# Allegro board democ2.brd
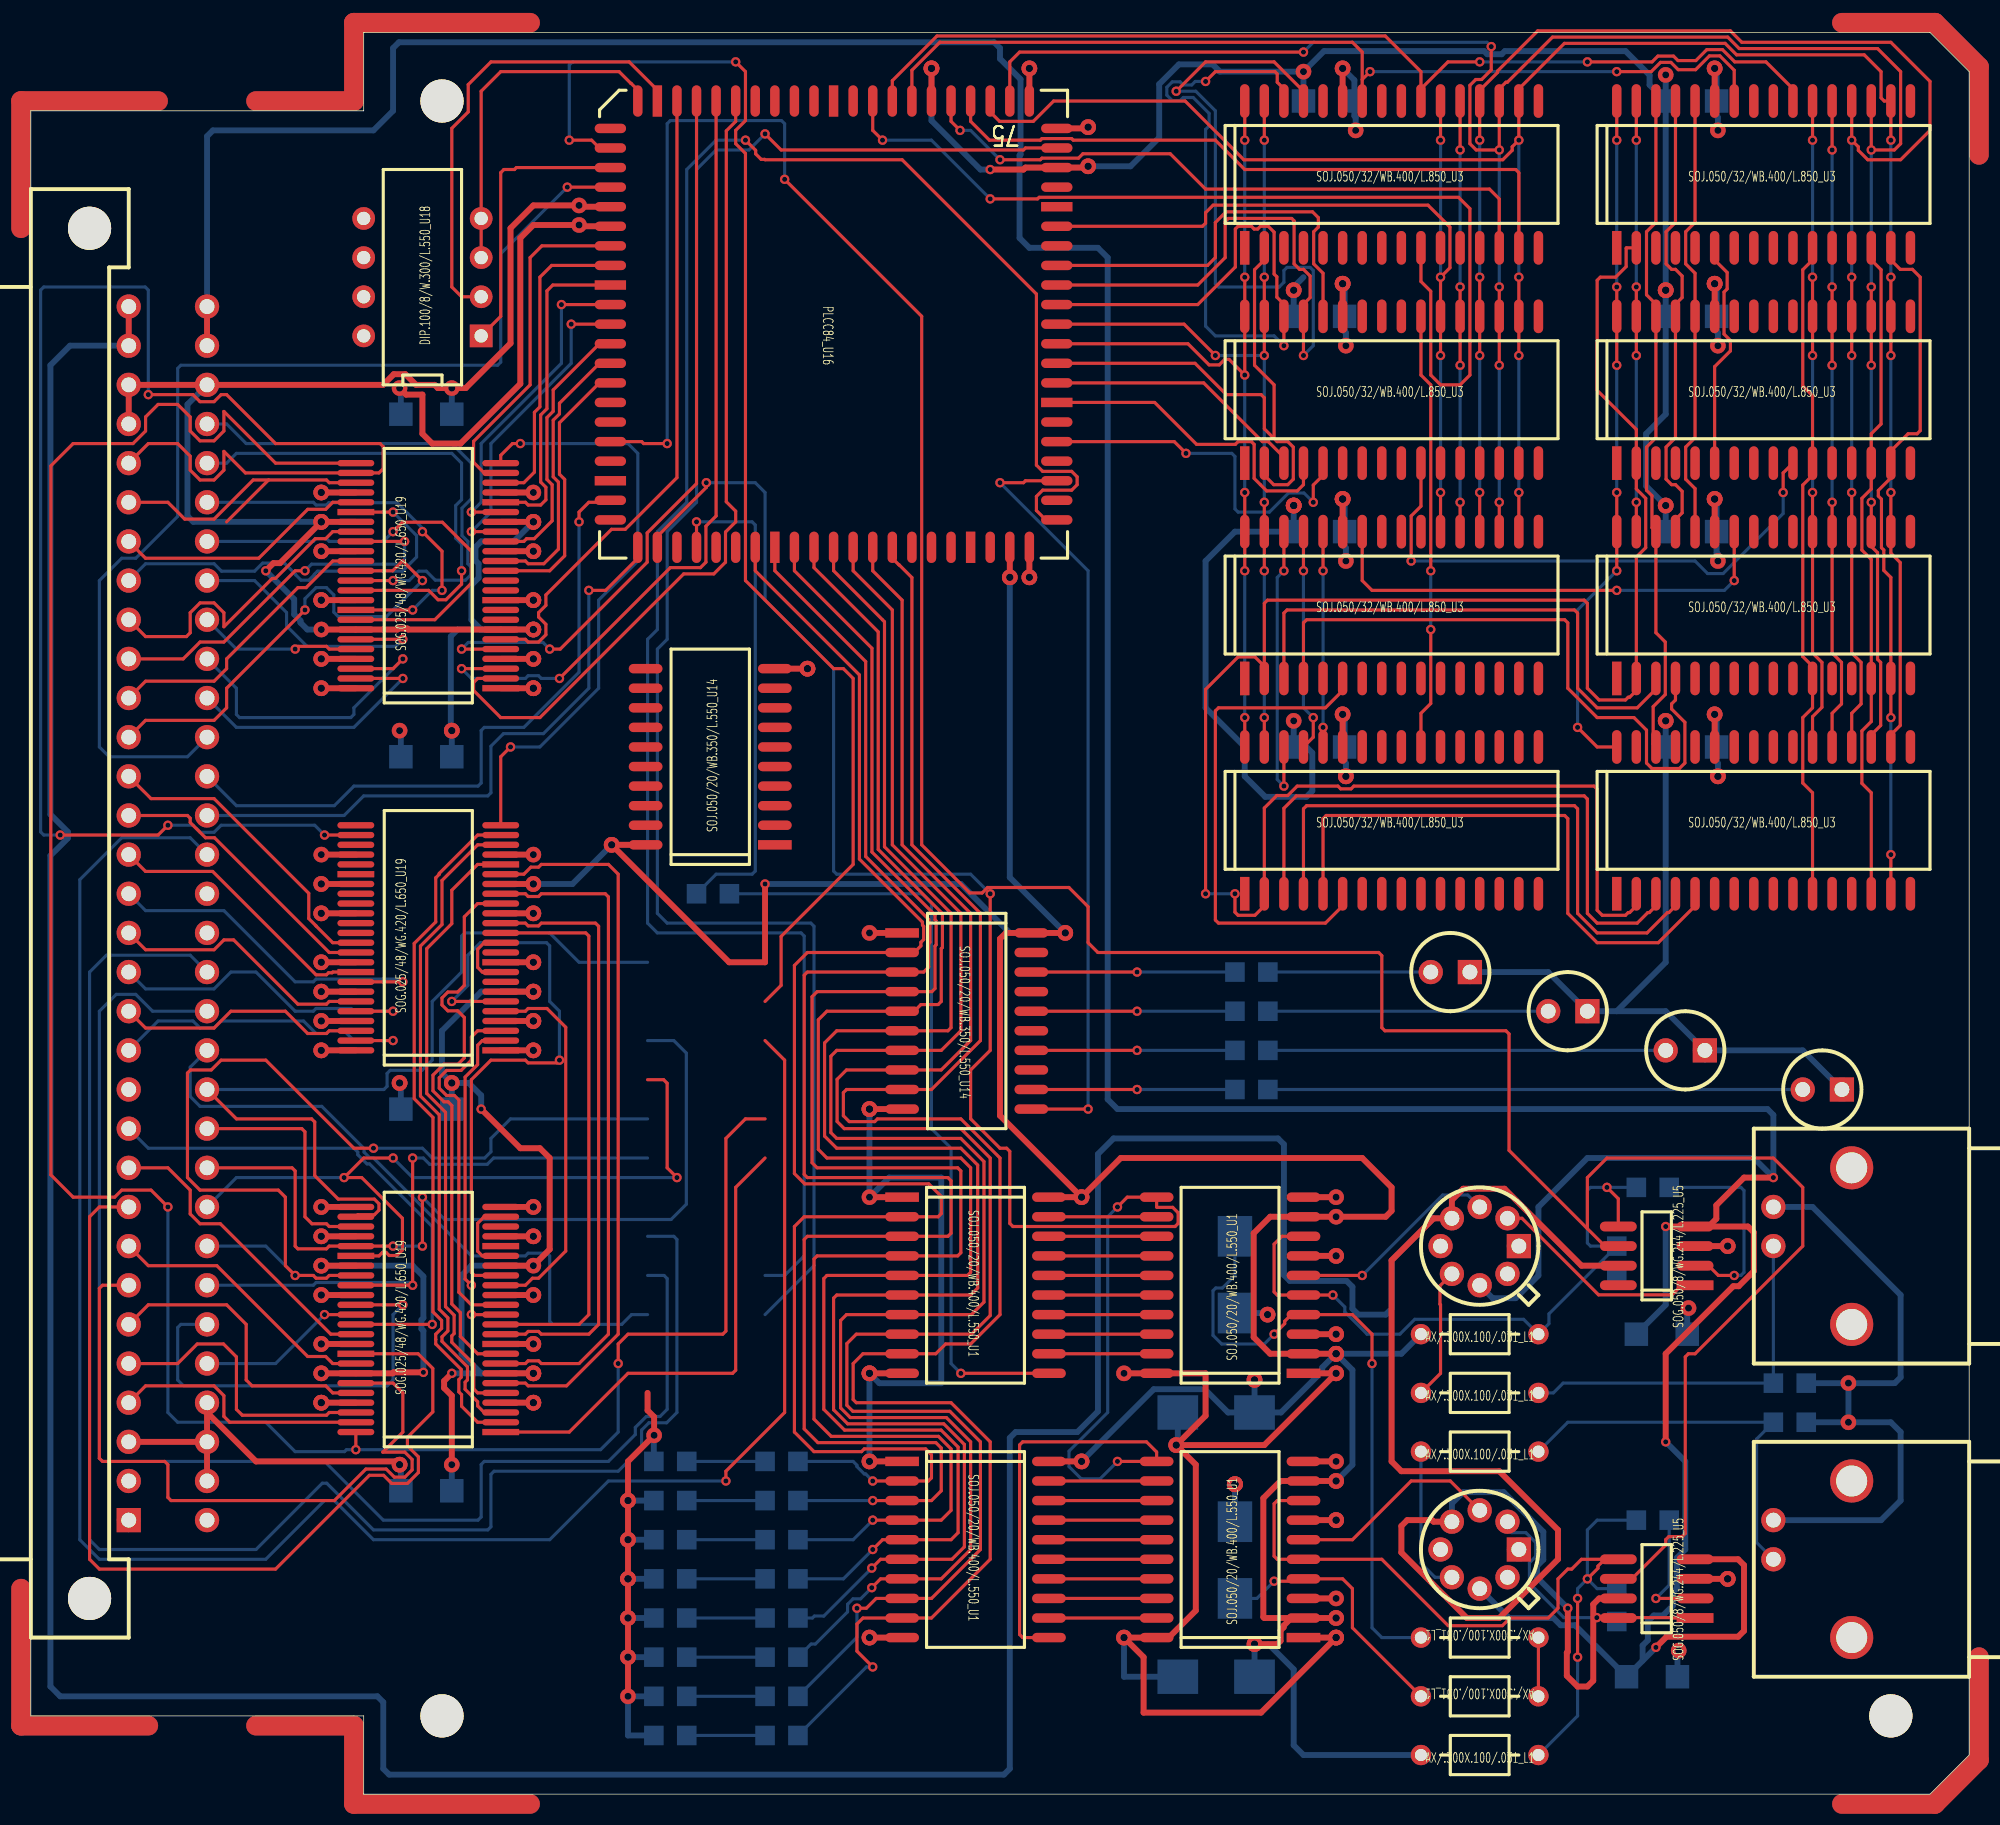
[diagram p0: board, top side]
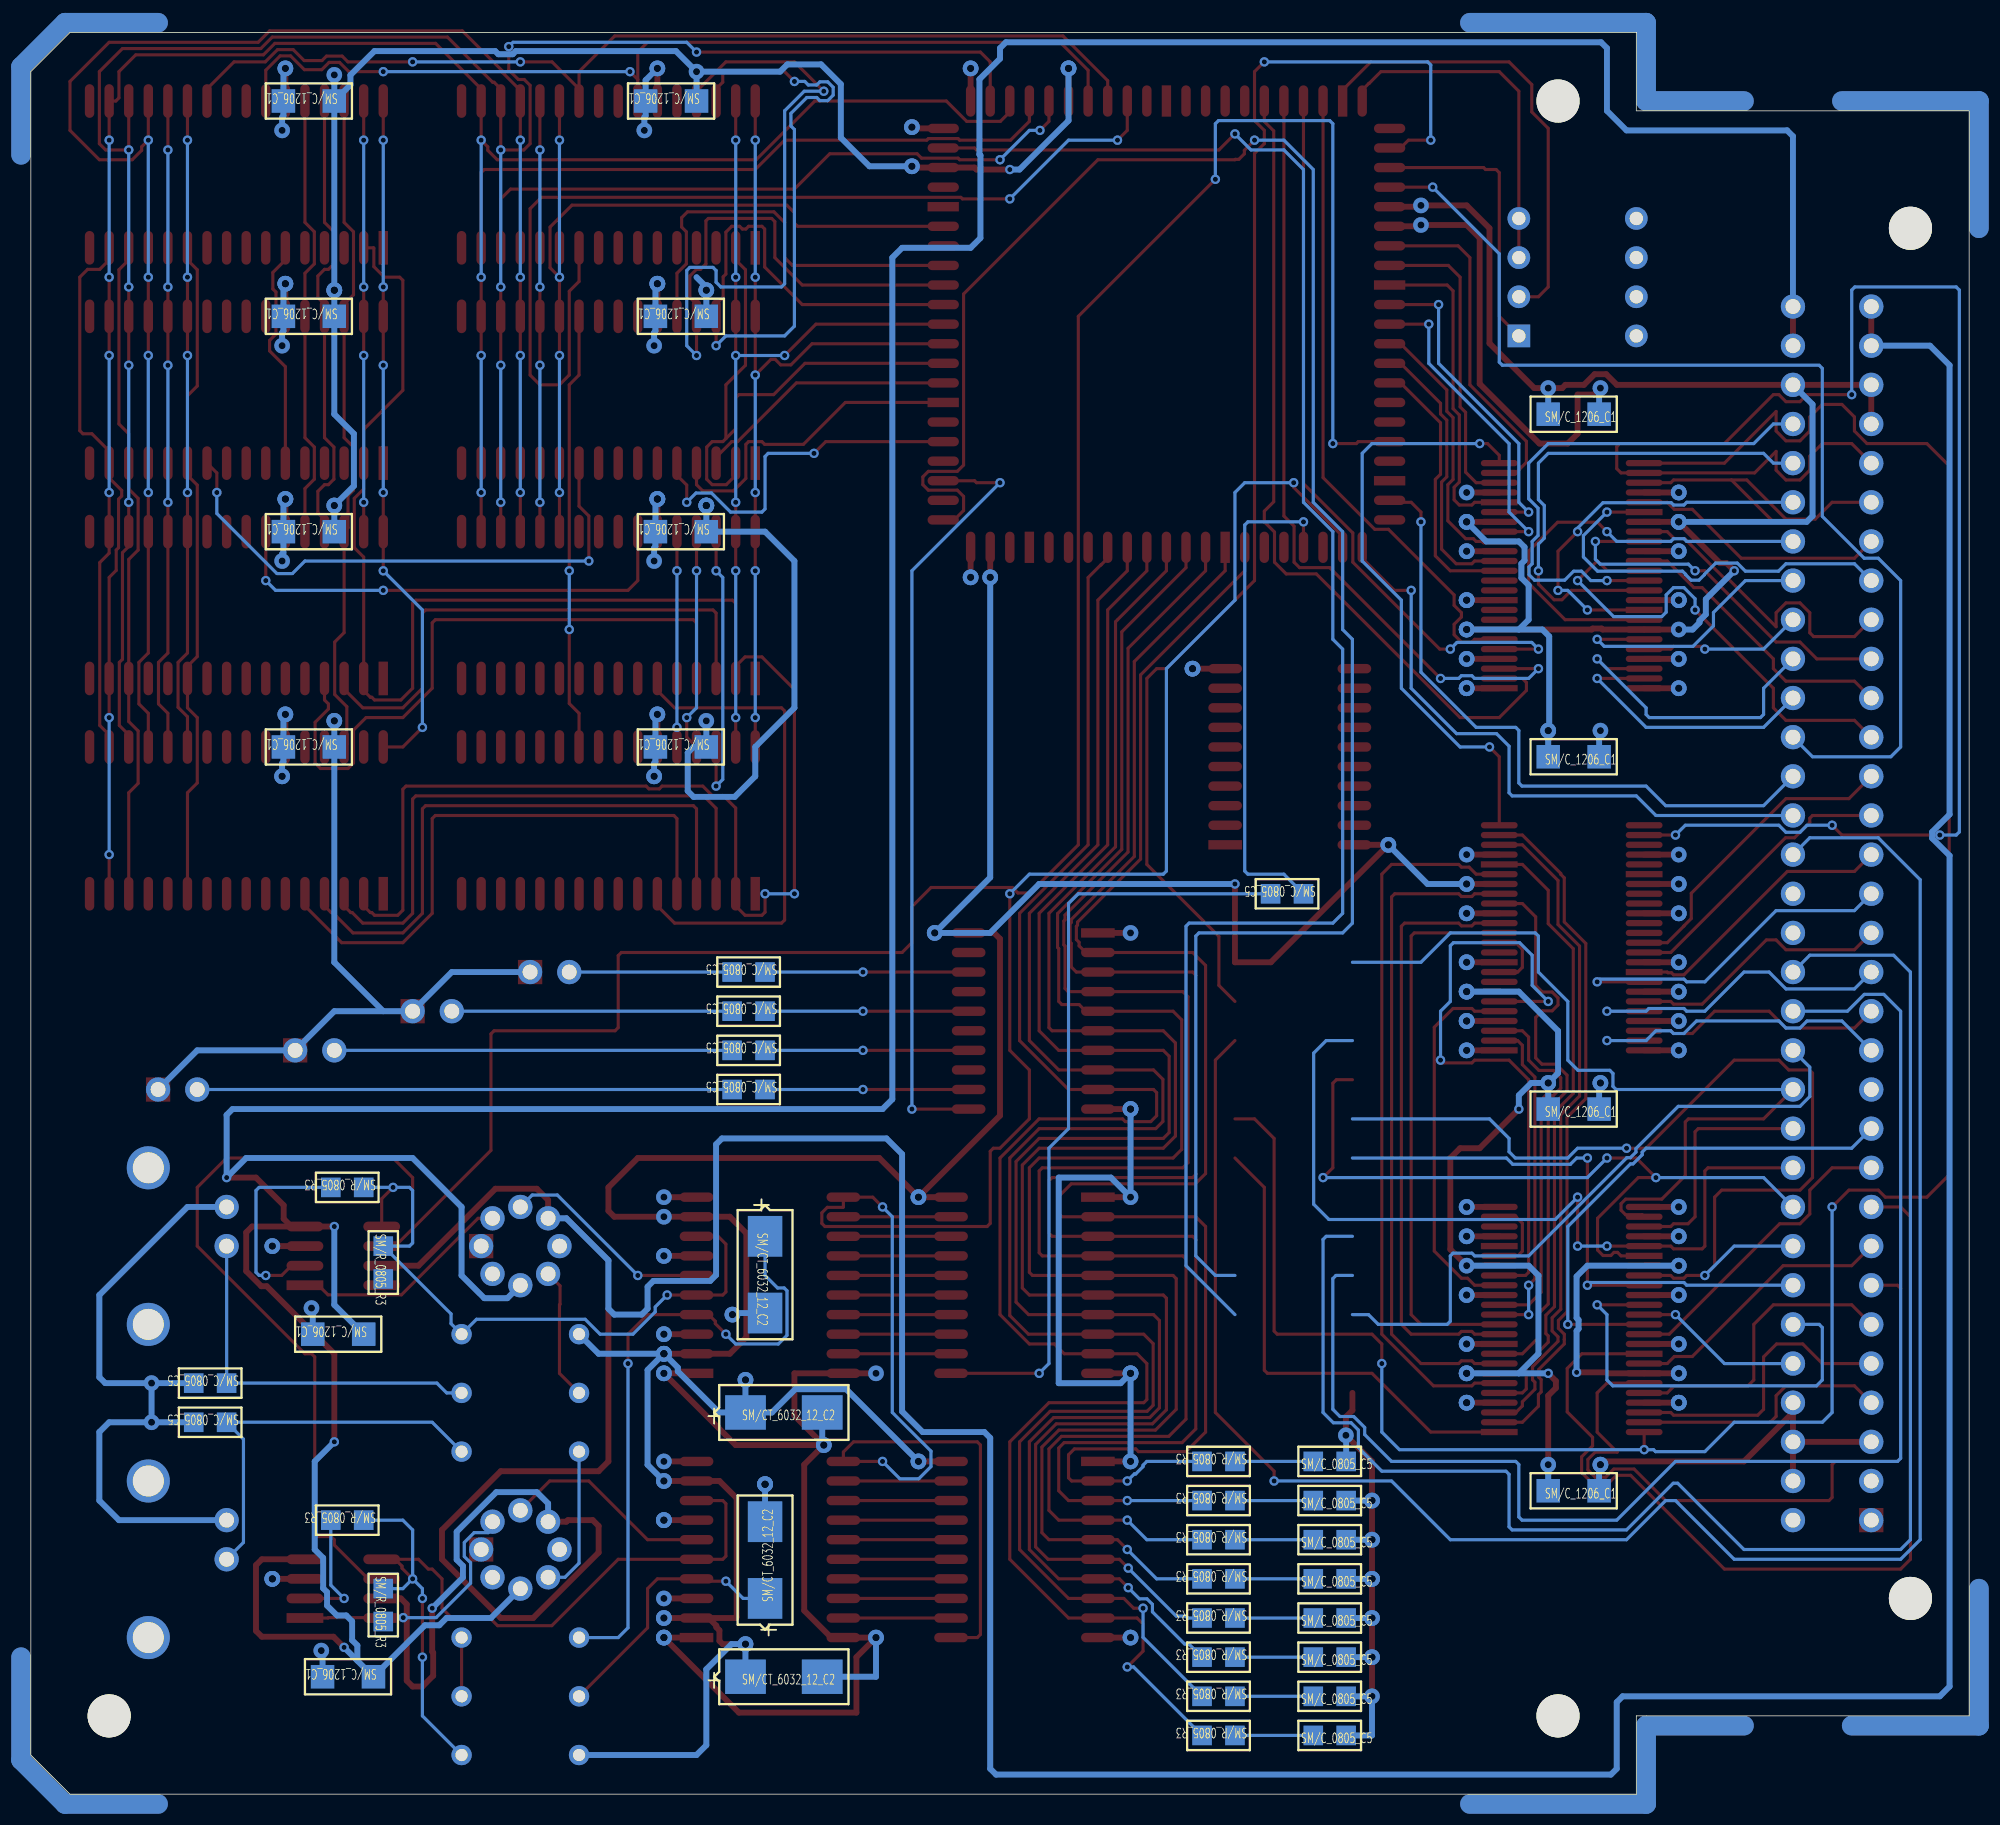
[diagram p1: board, bottom side, seen from below]

Outline 125.73 x 114.3 mm; copper layers: TOP, GND, POWER, BOTTOM. Coordinates in mm from the lower left corner of the outline.
Outline path: 0,109.22 21.59,109.22 21.59,114.3 123.19,114.3 125.73,111.76 125.73,2.54 123.19,0 21.59,0 21.59,5.08 0,5.08 0,109.22

## Design rules (mm)
nets with their own width: min track width 0.203; nets A0 A1 A2 A3 A4 A5 A6 A7 A8 A9 A10 A11 A12 A13 A14 A15 A16 A17 A18 A19 A20 A21 A22 A23 AEN/ BA0 BA1 BA2 BA3 BD0 BD1 BD2 BD3 BD4 BD5 BD6 BD7 BD8 BD9 BD10 BD11 BD12 BD13 BD14 BD15 BRD/ BRESET BWR/ D0 D1 D2 D3 D4 D5 D6 D7 D9 D10 D11 D12 D13 D14 D15 DDIR DEN/ DHEN/ FPGA/ GAIN HS/ MCLK MRD/ MWR/ N00036 N00036_6360 N00038 N00038_6372 N00044 N00044_6366 N00046 N00046_6362 N00048 N00048_6359 N00060 N00060_6368 N00306 N00318 N00322 N00671 N00689 N00703 N00717 N00827 N00831 N00835 N00837 N04966 N05690 N05692 N05694 N05696 N05698 N05700 N05702 N05704 N11940 N11950 N11984 N11994 N12004 N19706 N19710 N19714 N19718 N19934 N19938 N19942 N23417 N23878 N24816 N24821 N24826 N84247 N103899 N255822 N314771 N315146 N315333 N320476 N336036 N336041 OUTA OUTC RA0 RA1 RA2 RA3 RA4 RA5 RA6 RA7 RA8 RA9 RA10 RA11 RA12 RA13 RA14 RA15 RD0 RD1 RD2 RD3 RD4 RD5 RD6 RD7 RDY/ RESET/ SEL VCLKA VCLKC VD0 VD1 VD2 VD3 VD4 VD5 VD6 VD7 WAIT/ WSTAT/
nets with their own width: min track width 0.381; nets AGND GND GND_EARTH V12N V+12 VCC

## Placement (name value [footprint] x y rotation side)
C1  .1UF  [SMC1206]  104.14 29.84 0 bottom
C2  .1UF  [SMCT603212]  79.38 24.77 180 bottom
C3  .1UF  [SMCT603212]  79.38 7.62 180 bottom
C4  .1UF  [SMC1206]  106.05 109.86 0 bottom
C5  3300  [SMC0805]  42.55 6.35 180 bottom
C6  .1UF  [SMC1206]  103.51 7.62 0 bottom
C7  3300  [SMC0805]  42.55 21.59 180 bottom
C8  3300  [SMC0805]  42.55 8.89 180 bottom
C9  .1UF  [SMC1206]  27.3 89.53 180 bottom
C10  .1UF  [SMC1206]  27.3 67.31 180 bottom
C11  .1UF  [SMC1206]  27.3 44.45 180 bottom
C12  .1UF  [SMC1206]  106.05 81.91 0 bottom
C13  .1UF  [SMC1206]  106.05 95.89 0 bottom
C14  .1UF  [SMC1206]  106.05 67.95 0 bottom
C15  .1UF  [SMC1206]  27.3 19.69 180 bottom
C16  3300  [SMC0805]  42.55 11.43 180 bottom
C17  3300  [SMC0805]  42.55 13.97 180 bottom
C18  47PF  [SMC0805]  113.03 26.67 0 bottom
C19  3300  [SMC0805]  42.55 3.81 180 bottom
C20  3300  [SMC0805]  42.55 16.51 180 bottom
C21  .1UF  [SMCT603212]  78.11 12.7 90 bottom
C22  .1UF  [SMCT603212]  78.11 36.2 270 bottom
C23  47PF  [SMC0805]  113.03 24.13 0 bottom
C24  3300  [SMC0805]  42.55 19.05 180 bottom
C25  .1UF  [SMC1206]  82.55 109.86 0 bottom
C26  .1UF  [SMC1206]  81.92 95.89 0 bottom
C27  .1UF  [SMC1206]  81.92 81.91 0 bottom
C28  .1UF  [SMC1206]  81.92 67.95 0 bottom
D1  DIODE PHOTO EMIT  [LED]  100.97 50.8 180 top
D2  DIODE PHOTO EMIT  [LED]  93.34 53.34 180 top
D3  DIODE PHOTO EMIT  [LED]  108.59 48.26 180 top
D4  DIODE PHOTO EMIT  [LED]  117.48 45.72 180 top
J1  CON PAD  [DIN64P]  6.35 17.78 90 top
J2  CHANNEL 1  [BNC2P]  113.03 15.24 270 top
J3  CHANNEL 2  [BNC2P]  113.03 35.56 270 top
L1  50  [AX300X100031]  90.17 22.23 0 top
L2  50  [AX300X100031]  90.17 29.84 0 top
L3  50  [AX300X100031]  97.79 6.35 180 top
L4  50  [AX300X100031]  90.17 26.03 0 top
L5  50  [AX300X100031]  97.79 10.16 180 top
L6  50  [AX300X100031]  90.17 2.54 0 top
MTH1  -  [MTHOLE1]  26.67 109.86 0 top
MTH2  -  [MTHOLE1]  26.67 5.08 0 top
MTH3  -  [MTHOLE1]  120.65 5.08 0 top
R1  150  [SMC0805]  78.11 53.34 0 bottom
R2  150  [SMC0805]  78.11 50.8 0 bottom
R3  100  [SMR0805]  104.14 17.78 0 bottom
R4  100  [SMR0805]  102.87 13.34 270 bottom
R5  100  [SMR0805]  102.87 35.56 270 bottom
R6  100  [SMR0805]  104.14 39.37 0 bottom
R7  50  [SMR0805]  47.62 21.59 0 bottom
R8  50  [SMR0805]  47.62 8.89 0 bottom
R9  50  [SMR0805]  47.62 11.43 0 bottom
R10  50  [SMR0805]  47.62 6.35 0 bottom
R11  50  [SMC0805]  43.18 58.42 0 bottom
R12  150  [SMC0805]  78.11 45.72 0 bottom
R13  50  [SMR0805]  47.62 19.05 0 bottom
R14  50  [SMR0805]  47.62 16.51 0 bottom
R15  50  [SMR0805]  47.62 13.97 0 bottom
R16  50  [SMR0805]  47.62 3.81 0 bottom
R17  150  [SMC0805]  78.11 48.26 0 bottom
U1  TLC5602A  [SOJ05020WB400L550]  82.55 10.16 90 top
U2  TLC5602A  [SOJ05020WB400L550]  82.55 27.3 90 top
U3  TC55B4257J  [SOJ05032WB400L850]  102.87 86.36 0 top
U4  TC55B4257J  [SOJ05032WB400L850]  102.87 100.33 0 top
U5  DG419A  [SOG0508WG244L225]  107.95 33.02 90 top
U6  DG419A  [SOG0508WG244L225]  107.95 11.43 90 top
U8  TC55B4257J  [SOJ05032WB400L850]  78.74 72.39 0 top
U9  TC55B4257J  [SOJ05032WB400L850]  78.74 100.33 0 top
U10  TC55B4257J  [SOJ05032WB400L850]  102.87 72.39 0 top
U11  TC55B4257J  [SOJ05032WB400L850]  102.87 58.42 0 top
U12  TC55B4257J  [SOJ05032WB400L850]  78.74 58.42 0 top
U13  TC55B4257J  [SOJ05032WB400L850]  78.74 86.36 0 top
U14  ACT574  [SOJ05020WB350L550]  56.52 55.88 270 top
U15  ACT574  [SOJ05020WB400L550]  56.52 21.59 270 top
U16  EPF8282  [PLCC84]  52.07 109.86 270 top
U17  ACT574  [SOJ05020WB400L550]  56.52 38.73 270 top
U18  EPC1064  [DIP1008W300L550]  29.21 94.61 90 top
U19  FCT16245  [SOG02548WG420L650]  30.48 71.75 90 top
U20  FCT16245  [SOG02548WG420L650]  30.48 23.49 90 top
U21  FCT16245  [SOG02548WG420L650]  30.48 48.26 90 top
U22  TLE2037A  [TO-99]  96.52 35.56 90 top
U23  TLE2037A  [TO-99]  96.52 15.88 90 top
U25  74ACT574  [SOJ05020WB350L550]  48.26 61.59 90 top

## Library data of the parts
C1-C3 C5-C8 C16 C17 C19-C22 C24 = CAP: alternate symbols: (SMCT603212;SMC0805)
C4 C9-C15 C25-C28 = CAP_NP
C18 C23 = CAPACITOR
D1-D4 = DIODE_PHOTO_EMIT
J1 = 64CONSEPPINS
J2 J3 = BNC
L1-L6 = INDUCTOR
MTH1-MTH3 = MTHOLE1
R1-R17 = R: alternate symbols: (SMR0805)
U1 U2 = TLC5602A
U3 U4 U8-U13 = TC56B4257J
U5 U6 = DG419A
U14 U15 U17 = ACT574: alternate symbols: (SOJ05020WB400L550)
U16 = FPGA_0
U18 = EPC1064
U19-U21 = FCT16245
U22 U23 = TLE2037A
U25 = 74ACT574

## Footprints (pads in the part's own frame, mm; a bottom-side part is the same pattern mirrored in y, then rotated)
AX300X100031
  round 1.321 hole 0.787: 1(0,0) 2(7.62,0)
BNC2P
  round 1.575 hole 0.965: 1(0,0) 2(-2.54,0)
  round 2.794 hole 2.007: 3(5.08,5.08) 4(-5.08,5.08)
DIN64P
  rect 1.575x1.575 hole 0.965: 1(0,0)
  round 1.575 hole 0.965: 2(2.54,0) 3(5.08,0) 4(7.62,0) 5(10.16,0) 6(12.7,0) 7(15.24,0) 8(17.78,0) 9(20.32,0) 10(22.86,0) 11(25.4,0) 12(27.94,0) 13(30.48,0) 14(33.02,0) 15(35.56,0) 16(38.1,0) 17(40.64,0) 18(43.18,0) 19(45.72,0) 20(48.26,0) 21(50.8,0) 22(53.34,0) 23(55.88,0) 24(58.42,0) 25(60.96,0) 26(63.5,0) 27(66.04,0) 28(68.58,0) 29(71.12,0) 30(73.66,0) 31(76.2,0) 32(78.74,0) 33(0,-5.08) 34(2.54,-5.08) 35(5.08,-5.08) 36(7.62,-5.08) 37(10.16,-5.08) 38(12.7,-5.08) 39(15.24,-5.08) 40(17.78,-5.08) 41(20.32,-5.08) 42(22.86,-5.08) 43(25.4,-5.08) 44(27.94,-5.08) 45(30.48,-5.08) 46(33.02,-5.08) 47(35.56,-5.08) 48(38.1,-5.08) 49(40.64,-5.08) 50(43.18,-5.08) 51(45.72,-5.08) 52(48.26,-5.08) 53(50.8,-5.08) 54(53.34,-5.08) 55(55.88,-5.08) 56(58.42,-5.08) 57(60.96,-5.08) 58(63.5,-5.08) 59(66.04,-5.08) 60(68.58,-5.08) 61(71.12,-5.08) 62(73.66,-5.08) 63(76.2,-5.08) 64(78.74,-5.08)
  round 2.794 hole 2.794: 65(83.82,2.54) 66(-5.08,2.54)
DIP1008W300L550
  rect 1.473x1.473 hole 0.864: 1(0,0)
  round 1.473 hole 0.864: 2(2.54,0) 3(5.08,0) 4(7.62,0) 5(7.62,7.62) 6(5.08,7.62) 7(2.54,7.62) 8(0,7.62)
LED
  rect 1.575x1.575 hole 0.965: 1(0,0)
  round 1.575 hole 0.965: 2(2.54,0)
MTHOLE1
  round 2.794 hole 2.794: 1(0,0)
PLCC84
  rect 2.032x0.61 smd: 1(0,0) 10(0,-11.43) 40(28.956,-3.81) 50(28.956,8.89)
  oval 2.032x0.61 smd: 2(0,-1.27) 3(0,-2.54) 4(0,-3.81) 5(0,-5.08) 6(0,-6.35) 7(0,-7.62) 8(0,-8.89) 9(0,-10.16) 11(0,-12.7) 33(28.956,-12.7) 34(28.956,-11.43) 35(28.956,-10.16) 36(28.956,-8.89) 37(28.956,-7.62) 38(28.956,-6.35) 39(28.956,-5.08) 41(28.956,-2.54) 42(28.956,-1.27) 43(28.956,0) 44(28.956,1.27) 45(28.956,2.54) 46(28.956,3.81) 47(28.956,5.08) 48(28.956,6.35) 49(28.956,7.62) 51(28.956,10.16) 52(28.956,11.43) 53(28.956,12.7) 75(0,12.7) 76(0,11.43) 77(0,10.16) 78(0,8.89) 79(0,7.62) 80(0,6.35) 81(0,5.08) 82(0,3.81) 83(0,2.54) 84(0,1.27)
  oval 0.61x2.032 smd: 12(1.778,-14.478) 13(3.048,-14.478) 14(4.318,-14.478) 15(5.588,-14.478) 16(6.858,-14.478) 17(8.128,-14.478) 18(9.398,-14.478) 19(10.668,-14.478) 21(13.208,-14.478) 22(14.478,-14.478) 23(15.748,-14.478) 24(17.018,-14.478) 25(18.288,-14.478) 26(19.558,-14.478) 27(20.828,-14.478) 28(22.098,-14.478) 29(23.368,-14.478) 31(25.908,-14.478) 32(27.178,-14.478) 54(27.178,14.478) 55(25.908,14.478) 56(24.638,14.478) 57(23.368,14.478) 58(22.098,14.478) 59(20.828,14.478) 61(18.288,14.478) 62(17.018,14.478) 63(15.748,14.478) 64(14.478,14.478) 65(13.208,14.478) 66(11.938,14.478) 67(10.668,14.478) 68(9.398,14.478) 69(8.128,14.478) 71(5.588,14.478) 72(4.318,14.478) 73(3.048,14.478) 74(1.778,14.478)
  rect 0.61x2.032 smd: 20(11.938,-14.478) 30(24.638,-14.478) 60(19.558,14.478) 70(6.858,14.478)
SMC0805
  rect 1.27x1.27 smd: 1(0,0) 2(2.134,0)
SMC1206
  rect 1.524x1.524 smd: 1(0,0) 2(3.302,0)
SMCT603212
  rect 2.642x2.235 smd: 1(0,0) 2(4.978,0)
SMR0805
  rect 1.27x1.27 smd: 1(0,0) 2(2.134,0)
SOG0508WG244L225
  rect 0.635x2.388 smd: 1(0,0)
  oval 0.635x2.388 smd: 2(1.27,0) 3(2.54,0) 4(3.81,0) 5(3.81,4.978) 6(2.54,4.978) 7(1.27,4.978) 8(0,4.978)
SOG02548WG420L650
  rect 0.406x2.388 smd: 1(0,0) 10(5.715,0) 20(12.065,0) 30(11.43,9.398) 40(5.08,9.398)
  oval 0.406x2.388 smd: 2(0.635,0) 3(1.27,0) 4(1.905,0) 5(2.54,0) 6(3.175,0) 7(3.81,0) 8(4.445,0) 9(5.08,0) 11(6.35,0) 12(6.985,0) 13(7.62,0) 14(8.255,0) 15(8.89,0) 16(9.525,0) 17(10.16,0) 18(10.795,0) 19(11.43,0) 21(12.7,0) 22(13.335,0) 23(13.97,0) 24(14.605,0) 25(14.605,9.398) 26(13.97,9.398) 27(13.335,9.398) 28(12.7,9.398) 29(12.065,9.398) 31(10.795,9.398) 32(10.16,9.398) 33(9.525,9.398) 34(8.89,9.398) 35(8.255,9.398) 36(7.62,9.398) 37(6.985,9.398) 38(6.35,9.398) 39(5.715,9.398) 41(4.445,9.398) 42(3.81,9.398) 43(3.175,9.398) 44(2.54,9.398) 45(1.905,9.398) 46(1.27,9.398) 47(0.635,9.398) 48(0,9.398)
SOJ05020WB350L550
  rect 0.61x2.184 smd: 1(0,0)
  oval 0.61x2.184 smd: 2(1.27,0) 3(2.54,0) 4(3.81,0) 5(5.08,0) 6(6.35,0) 7(7.62,0) 8(8.89,0) 9(10.16,0) 10(11.43,0) 11(11.43,8.382) 12(10.16,8.382) 13(8.89,8.382) 14(7.62,8.382) 15(6.35,8.382) 16(5.08,8.382) 17(3.81,8.382) 18(2.54,8.382) 19(1.27,8.382) 20(0,8.382)
SOJ05020WB400L550
  rect 0.61x2.184 smd: 1(0,0)
  oval 0.61x2.184 smd: 2(1.27,0) 3(2.54,0) 4(3.81,0) 5(5.08,0) 6(6.35,0) 7(7.62,0) 8(8.89,0) 9(10.16,0) 10(11.43,0) 11(11.43,9.525) 12(10.16,9.525) 13(8.89,9.525) 14(7.62,9.525) 15(6.35,9.525) 16(5.08,9.525) 17(3.81,9.525) 18(2.54,9.525) 19(1.27,9.525) 20(0,9.525)
SOJ05032WB400L850
  rect 0.61x2.184 smd: 1(0,0)
  oval 0.61x2.184 smd: 2(1.27,0) 3(2.54,0) 4(3.81,0) 5(5.08,0) 6(6.35,0) 7(7.62,0) 8(8.89,0) 9(10.16,0) 10(11.43,0) 11(12.7,0) 12(13.97,0) 13(15.24,0) 14(16.51,0) 15(17.78,0) 16(19.05,0) 17(19.05,9.525) 18(17.78,9.525) 19(16.51,9.525) 20(15.24,9.525) 21(13.97,9.525) 22(12.7,9.525) 23(11.43,9.525) 24(10.16,9.525) 25(8.89,9.525) 26(7.62,9.525) 27(6.35,9.525) 28(5.08,9.525) 29(3.81,9.525) 30(2.54,9.525) 31(1.27,9.525) 32(0,9.525)
TO-99
  rect 1.575x1.575 hole 0.965: 1(0,0)
  round 1.575 hole 0.965: 2(1.803,0.737) 3(2.54,2.54) 4(1.803,4.343) 5(0,5.08) 6(-1.803,4.343) 7(-2.54,2.54) 8(-1.803,0.737)

## Nets
AGND: C1.2(TP-2) C6.2(TP-2) C21.2(TP-2) C22.2(TP-2) J1.1(TP-1) J1.2(TP-2) J1.33(TP-33) U1.3(TP-3) U1.7(TP-7) U1.10(TP-10) U2.3(TP-3) U2.7(TP-7) U2.10(TP-10) U5.3(TP-3) U6.3(TP-3)
GND: C2.2(TP-2) C3.2(TP-2) C4.2(TP-2) C5.2(TP-2) C7.2(TP-2) C8.2(TP-2) C9.2(TP-2) C10.2(TP-2) C11.2(TP-2) C12.2(TP-2) C13.2(TP-2) C14.2(TP-2) C15.2(TP-2) C16.2(TP-2) C17.2(TP-2) C19.2(TP-2) C20.2(TP-2) C24.2(TP-2) C25.2(TP-2) C26.2(TP-2) C27.2(TP-2) C28.2(TP-2) J1.3(TP-3) J1.34(TP-34) J1.35(TP-35) J1.36(TP-36) U1.1(TP-1) U1.20(TP-20) U2.1(TP-1) U2.20(TP-20) U3.27(TP-27) U4.27(TP-27) U8.27(TP-27) U9.27(TP-27) U10.27(TP-27) U11.27(TP-27) U12.27(TP-27) U13.27(TP-27) U14.1(TP-1) U14.10(TP-10) U15.1(TP-1) U15.10(TP-10) U16.17(TP-17) U16.53(TP-53) U16.74(TP-74) U16.75(TP-75) U17.1(TP-1) U17.10(TP-10) U19.1(TP-1) U19.4(TP-4) U19.10(TP-10) U19.15(TP-15) U19.21(TP-21) U19.28(TP-28) U19.34(TP-34) U19.39(TP-39) U19.45(TP-45) U19.48(TP-48) U20.4(TP-4) U20.10(TP-10) U20.15(TP-15) U20.21(TP-21) U20.24(TP-24) U20.25(TP-25) U20.28(TP-28) U20.34(TP-34) U20.39(TP-39) U20.45(TP-45) U21.1(TP-1) U21.4(TP-4) U21.10(TP-10) U21.15(TP-15) U21.21(TP-21) U21.28(TP-28) U21.34(TP-34) U21.39(TP-39) U21.45(TP-45) U21.48(TP-48) U25.10(TP-10)
GND_EARTH: C18.2(TP-2) C23.2(TP-2) J2.2(TP-2) J3.2(TP-2)
V12N: J1.31(TP-31) J1.32(TP-32) U5.7(TP-7) U6.7(TP-7) U22.4(TP-4) U23.4(TP-4)
VCC: C2.1(TP-1) C3.1(TP-1) C4.1(TP-1) C9.1(TP-1) C10.1(TP-1) C11.1(TP-1) C12.1(TP-1) C13.1(TP-1) C14.1(TP-1) C15.1(TP-1) C25.1(TP-1) C26.1(TP-1) C27.1(TP-1) C28.1(TP-1) D1.1(TP-1) D2.1(TP-1) D3.1(TP-1) D4.1(TP-1) J1.29(TP-29) J1.30(TP-30) J1.62(TP-62) L2.1(TP-1) L6.1(TP-1) U1.2(TP-2) U1.9(TP-9) U2.2(TP-2) U2.9(TP-9) U14.20(TP-20) U15.20(TP-20) U16.16(TP-16) U16.52(TP-52) U16.72(TP-72) U16.80(TP-80) U17.20(TP-20) U19.7(TP-7) U19.18(TP-18) U19.31(TP-31) U19.42(TP-42) U20.7(TP-7) U20.18(TP-18) U20.31(TP-31) U20.42(TP-42) U21.7(TP-7) U21.18(TP-18) U21.31(TP-31) U21.42(TP-42) U25.20(TP-20)
A0: J1.54(TP-54) U19.47(TP-47)
A1: J1.55(TP-55) U19.46(TP-46)
A2: J1.56(TP-56) U19.44(TP-44)
A3: J1.57(TP-57) U19.43(TP-43)
A4: J1.58(TP-58) U19.41(TP-41)
A5: J1.59(TP-59) U19.40(TP-40)
A6: J1.60(TP-60) U19.38(TP-38)
A7: J1.61(TP-61) U19.37(TP-37)
A8: J1.13(TP-13) U21.47(TP-47)
A9: J1.14(TP-14) U21.46(TP-46)
A10: J1.15(TP-15) U21.44(TP-44)
A11: J1.16(TP-16) U21.43(TP-43)
A12: J1.17(TP-17) U21.41(TP-41)
A13: J1.18(TP-18) U21.40(TP-40)
A14: J1.19(TP-19) U21.38(TP-38)
A15: J1.20(TP-20) U21.37(TP-37)
A16: J1.37(TP-37) U20.36(TP-36)
A17: J1.38(TP-38) U20.35(TP-35)
A18: J1.39(TP-39) U20.33(TP-33)
A19: J1.40(TP-40) U20.32(TP-32)
A20: J1.41(TP-41) U20.30(TP-30)
A21: J1.42(TP-42) U20.29(TP-29)
A22: J1.43(TP-43) U20.27(TP-27)
A23: J1.44(TP-44) U20.26(TP-26)
AEN/: J1.47(TP-47)
BA0: U16.6(TP-6) U19.2(TP-2) U20.13(TP-13) U21.2(TP-2)
BA1: U16.7(TP-7) U19.3(TP-3) U20.14(TP-14) U21.3(TP-3)
BA2: U16.8(TP-8) U19.5(TP-5) U20.16(TP-16) U21.5(TP-5)
BA3: U16.9(TP-9) U19.6(TP-6) U20.17(TP-17) U21.6(TP-6)
BD0: U16.25(TP-25) U19.13(TP-13)
BD1: U16.24(TP-24) U19.14(TP-14)
BD2: U16.23(TP-23) U19.16(TP-16)
BD3: U16.22(TP-22) U19.17(TP-17)
BD4: U16.21(TP-21) U19.19(TP-19)
BD5: U16.20(TP-20) U19.20(TP-20)
BD6: U16.19(TP-19) U19.22(TP-22)
BD7: U16.18(TP-18) U19.23(TP-23)
BD8: U20.2(TP-2) U21.23(TP-23)
BD9: U20.3(TP-3) U21.22(TP-22)
BD10: U20.5(TP-5) U21.20(TP-20)
BD11: U20.6(TP-6) U21.19(TP-19)
BD12: U20.8(TP-8) U21.17(TP-17)
BD13: U20.9(TP-9) U21.16(TP-16)
BD14: U20.11(TP-11) U21.14(TP-14)
BD15: U20.12(TP-12) U21.13(TP-13)
BRD/: U16.73(TP-73)
BRESET: U16.12(TP-12)
BWR/: U16.54(TP-54)
D0: J1.28(TP-28) U19.26(TP-26) U21.26(TP-26)
D1: J1.27(TP-27) U19.27(TP-27) U21.27(TP-27)
D2: J1.26(TP-26) U19.29(TP-29) U21.29(TP-29)
D3: J1.25(TP-25) U19.30(TP-30) U21.30(TP-30)
D4: J1.24(TP-24) U19.32(TP-32) U21.32(TP-32)
D5: J1.23(TP-23) U19.33(TP-33) U21.33(TP-33)
D6: J1.4(TP-4) J1.22(TP-22) U19.35(TP-35) U20.47(TP-47) U21.35(TP-35)
D7: J1.21(TP-21) U19.36(TP-36) U21.36(TP-36)
D9: J1.5(TP-5) U20.46(TP-46)
D10: J1.6(TP-6) U20.44(TP-44)
D11: J1.7(TP-7) U20.43(TP-43)
D12: J1.8(TP-8) U20.41(TP-41)
D13: J1.9(TP-9) U20.40(TP-40)
D14: J1.10(TP-10) U20.38(TP-38)
D15: J1.11(TP-11) U20.37(TP-37)
DDIR: U19.24(TP-24) U20.1(TP-1) U21.24(TP-24)
DEN/: U19.25(TP-25) U20.48(TP-48)
DHEN/: U21.25(TP-25)
FPGA/: U16.30(TP-30)
GAIN: U5.6(TP-6) U6.6(TP-6) U16.28(TP-28)
HS/: U16.29(TP-29)
MCLK: J1.52(TP-52) U16.31(TP-31)
MRD/: J1.46(TP-46)
MWR/: J1.45(TP-45)
N00036_6360: L6.2(TP-2) R3.1(TP-1) R4.1(TP-1) U1.5(TP-5) U1.8(TP-8) U6.5(TP-5)
N00038_6372: C21.1(TP-1) L3.2(TP-2) U1.4(TP-4)
N00044_6366: U6.1(TP-1) U23.2(TP-2)
N00046_6362: R4.2(TP-2) U6.8(TP-8)
N00048_6359: R3.2(TP-2) U6.2(TP-2)
N00060_6368: U1.6(TP-6) U23.3(TP-3)
OUTA: L1.1(TP-1) U23.6(TP-6)
OUTC: L4.1(TP-1) U22.6(TP-6)
RA0: U3.5(TP-5) U4.5(TP-5) U8.5(TP-5) U9.5(TP-5) U10.5(TP-5) U11.5(TP-5) U12.5(TP-5) U13.5(TP-5) U16.58(TP-58)
RA1: U3.4(TP-4) U4.4(TP-4) U8.4(TP-4) U9.4(TP-4) U10.4(TP-4) U11.4(TP-4) U12.4(TP-4) U13.4(TP-4) U16.60(TP-60)
RA2: U3.3(TP-3) U4.3(TP-3) U8.3(TP-3) U9.3(TP-3) U10.3(TP-3) U11.3(TP-3) U12.3(TP-3) U13.3(TP-3) U16.61(TP-61)
RA3: U3.2(TP-2) U4.2(TP-2) U8.2(TP-2) U9.2(TP-2) U10.2(TP-2) U11.2(TP-2) U12.2(TP-2) U13.2(TP-2) U16.62(TP-62)
RA4: U3.32(TP-32) U4.32(TP-32) U8.32(TP-32) U9.32(TP-32) U10.32(TP-32) U11.32(TP-32) U12.32(TP-32) U13.32(TP-32) U16.63(TP-63)
RA5: U3.31(TP-31) U4.31(TP-31) U8.31(TP-31) U9.31(TP-31) U10.31(TP-31) U11.31(TP-31) U12.31(TP-31) U13.31(TP-31) U16.64(TP-64)
RA6: U3.30(TP-30) U4.30(TP-30) U8.30(TP-30) U9.30(TP-30) U10.30(TP-30) U11.30(TP-30) U12.30(TP-30) U13.30(TP-30) U16.65(TP-65)
RA7: U3.29(TP-29) U4.29(TP-29) U8.29(TP-29) U9.29(TP-29) U10.29(TP-29) U11.29(TP-29) U12.29(TP-29) U13.29(TP-29) U16.66(TP-66)
RA8: U3.28(TP-28) U4.28(TP-28) U8.28(TP-28) U9.28(TP-28) U10.28(TP-28) U11.28(TP-28) U12.28(TP-28) U13.28(TP-28) U16.67(TP-67)
RA9: U3.22(TP-22) U4.22(TP-22) U8.22(TP-22) U9.22(TP-22) U10.22(TP-22) U11.22(TP-22) U12.22(TP-22) U13.22(TP-22) U16.69(TP-69)
RA10: U3.21(TP-21) U4.21(TP-21) U8.21(TP-21) U9.21(TP-21) U10.21(TP-21) U11.21(TP-21) U12.21(TP-21) U13.21(TP-21) U16.70(TP-70)
RA11: U3.20(TP-20) U4.20(TP-20) U8.20(TP-20) U9.20(TP-20) U10.20(TP-20) U11.20(TP-20) U12.20(TP-20) U13.20(TP-20) U16.71(TP-71)
RA12: U3.19(TP-19) U4.19(TP-19) U8.19(TP-19) U9.19(TP-19) U10.19(TP-19) U11.19(TP-19) U12.19(TP-19) U13.19(TP-19) U16.76(TP-76)
RA13: U3.18(TP-18) U4.18(TP-18) U8.18(TP-18) U9.18(TP-18) U10.18(TP-18) U11.18(TP-18) U12.18(TP-18) U13.18(TP-18) U16.77(TP-77)
RA14: U3.15(TP-15) U4.15(TP-15) U8.15(TP-15) U9.15(TP-15) U10.15(TP-15) U11.15(TP-15) U12.15(TP-15) U13.15(TP-15) U16.78(TP-78)
RA15: U3.14(TP-14) U4.14(TP-14) U8.14(TP-14) U9.14(TP-14) U10.14(TP-14) U11.14(TP-14) U12.14(TP-14) U13.14(TP-14) U16.79(TP-79)
RD0: U4.26(TP-26) U8.26(TP-26) U9.26(TP-26) U10.26(TP-26) U16.81(TP-81)
RD1: U4.23(TP-23) U8.23(TP-23) U9.23(TP-23) U10.23(TP-23) U16.82(TP-82)
RD2: U4.10(TP-10) U8.10(TP-10) U9.10(TP-10) U10.10(TP-10) U16.83(TP-83)
RD3: U4.7(TP-7) U8.7(TP-7) U9.7(TP-7) U10.7(TP-7) U16.84(TP-84)
RD4: U3.26(TP-26) U11.26(TP-26) U12.26(TP-26) U13.26(TP-26) U16.1(TP-1)
RD5: U3.23(TP-23) U11.23(TP-23) U12.23(TP-23) U13.23(TP-23) U16.2(TP-2)
RD6: U3.10(TP-10) U11.10(TP-10) U12.10(TP-10) U13.10(TP-10) U16.3(TP-3)
RD7: U3.7(TP-7) U11.7(TP-7) U12.7(TP-7) U13.7(TP-7) U16.4(TP-4)
RDY/: J1.50(TP-50)
RESET/: J1.53(TP-53) U16.15(TP-15)
SEL: U16.13(TP-13)
V+12: C1.1(TP-1) C6.1(TP-1) J1.63(TP-63) J1.64(TP-64) U5.4(TP-4) U6.4(TP-4) U22.7(TP-7) U23.7(TP-7)
VCLKA: U1.11(TP-11) U2.11(TP-11) U15.11(TP-11) U16.34(TP-34)
VCLKC: R11.2(TP-2) U17.11(TP-11)
VD0: R7.2(TP-2) U14.2(TP-2) U15.2(TP-2) U16.39(TP-39) U17.2(TP-2)
VD1: R13.2(TP-2) U14.3(TP-3) U15.3(TP-3) U16.40(TP-40) U17.3(TP-3)
VD2: R14.2(TP-2) U14.4(TP-4) U15.4(TP-4) U16.41(TP-41) U17.4(TP-4)
VD3: R15.2(TP-2) U14.5(TP-5) U15.5(TP-5) U16.42(TP-42) U17.5(TP-5)
VD4: R9.2(TP-2) U14.6(TP-6) U15.6(TP-6) U16.43(TP-43) U17.6(TP-6)
VD5: R8.2(TP-2) U14.7(TP-7) U15.7(TP-7) U16.44(TP-44) U17.7(TP-7)
VD6: R10.2(TP-2) U14.8(TP-8) U15.8(TP-8) U16.45(TP-45) U17.8(TP-8)
VD7: R16.2(TP-2) U14.9(TP-9) U15.9(TP-9) U16.46(TP-46) U17.9(TP-9)
WAIT/: J1.51(TP-51) U16.33(TP-33)
WSTAT/: U14.11(TP-11) U16.56(TP-56)
N00036: L2.2(TP-2) R5.1(TP-1) R6.1(TP-1) U2.5(TP-5) U2.8(TP-8) U5.5(TP-5)
N00038: C22.1(TP-1) L5.2(TP-2) U2.4(TP-4)
N00044: U5.1(TP-1) U22.2(TP-2)
N00046: R5.2(TP-2) U5.8(TP-8)
N00048: R6.2(TP-2) U5.2(TP-2)
N00060: U2.6(TP-6) U22.3(TP-3)
N00306: U1.12(TP-12) U15.19(TP-19)
N00318: U1.15(TP-15) U15.16(TP-16)
N00322: U1.16(TP-16) U15.15(TP-15)
N00671: C19.1(TP-1) R16.1(TP-1)
N00689: C5.1(TP-1) R10.1(TP-1)
N00703: C8.1(TP-1) R8.1(TP-1)
N00717: C16.1(TP-1) R9.1(TP-1)
N00827: C17.1(TP-1) R15.1(TP-1)
N00831: C20.1(TP-1) R14.1(TP-1)
N00835: C24.1(TP-1) R13.1(TP-1)
N00837: C7.1(TP-1) R7.1(TP-1)
N04966: L3.1(TP-1) L5.1(TP-1)
N05690: U2.12(TP-12) U17.19(TP-19)
N05692: U2.18(TP-18) U17.13(TP-13)
N05694: U2.13(TP-13) U17.18(TP-18)
N05696: U2.19(TP-19) U17.12(TP-12)
N05698: U2.17(TP-17) U17.14(TP-14)
N05700: U2.14(TP-14) U17.17(TP-17)
N05702: U2.15(TP-15) U17.16(TP-16)
N05704: U2.16(TP-16) U17.15(TP-15)
N11940: U1.13(TP-13) U15.18(TP-18)
N11950: U1.14(TP-14) U15.17(TP-17)
N11984: U1.17(TP-17) U15.14(TP-14)
N11994: U1.18(TP-18) U15.13(TP-13)
N12004: U1.19(TP-19) U15.12(TP-12)
N19706: R1.1(TP-1) U14.18(TP-18)
N19710: R2.1(TP-1) U14.16(TP-16)
N19714: R17.1(TP-1) U14.14(TP-14)
N19718: R12.1(TP-1) U14.12(TP-12)
N19934: D4.2(TP-2) R12.2(TP-2)
N19938: D3.2(TP-2) R17.2(TP-2)
N19942: D1.2(TP-2) R2.2(TP-2)
N23417: U10.6(TP-6) U13.6(TP-6) U16.48(TP-48)
N23878: R11.1(TP-1) U16.36(TP-36)
N24816: U16.14(TP-14) U18.1(TP-1)
N24821: U16.10(TP-10) U18.2(TP-2)
N24826: U16.11(TP-11) U18.3(TP-3) U18.4(TP-4)
N84247: U19.9(TP-9) U20.22(TP-22) U21.9(TP-9) U21.12(TP-12)
N103899: U19.8(TP-8) U19.12(TP-12) U20.19(TP-19) U20.23(TP-23) U21.8(TP-8) U21.11(TP-11)
N255822: D2.2(TP-2) R1.2(TP-2)
N314771: U3.6(TP-6) U4.6(TP-6) U16.51(TP-51)
N315146: U9.6(TP-6) U11.6(TP-6) U16.50(TP-50)
N315333: U8.6(TP-6) U12.6(TP-6) U16.49(TP-49)
N320476: U3.11(TP-11) U4.11(TP-11) U8.11(TP-11) U9.11(TP-11) U10.11(TP-11) U11.11(TP-11) U12.11(TP-11) U13.11(TP-11) U16.57(TP-57)
N336036: C23.1(TP-1) J2.1(TP-1) L1.2(TP-2)
N336041: C18.1(TP-1) J3.1(TP-1) L4.2(TP-2)

Pads without a net: J1 12 48 49 65 66; J2 3 4; J3 3 4; MTH1 1; MTH2 1; MTH3 1; U3 1 8 9 12 13 16 17 24 25; U4 1 8 9 12 13 16 17 24 25; U8 1 8 9 12 13 16 17 24 25; U9 1 8 9 12 13 16 17 24 25; U10 1 8 9 12 13 16 17 24 25; U11 1 8 9 12 13 16 17 24 25; U12 1 8 9 12 13 16 17 24 25; U13 1 8 9 12 13 16 17 24 25; U14 13 15 17 19; U16 5 26 27 32 35 37 38 47 55 59 68; U18 5 6 7 8; U19 11; U20 20; U22 1 5 8; U23 1 5 8; U25 1 2 3 4 5 6 7 8 9 11 12 13 14 15 16 17 18 19

## Via types
v1: diameter 0.61, hole 0.33, TOP to BOTTOM, 200 vias
v2: diameter 1.016, hole 0.457, TOP to BOTTOM, 248 vias

## Routing (per net, layer and track width the routed paths; a pad name or vN(x,y) marks a point on that pad's centre or on a via; arc(x,y) is an arc through that point)
AGND: length 38.4
  TOP w0.381: U2.3 v2(84.67,29.84) ; v2(110.07,35.56) U5.3 ; U6.3 v2(110.07,13.97) ; v2(84.67,21.59) U1.10 ; 82.55,34.92 v2(84.67,34.92) ; v2(84.67,17.78) U1.7 ; U1.3 v2(84.67,12.7) ; v2(84.67,38.73) U2.10
  GND w0.381: J1.2 7.47,20.32 ; J1.2 5.23,20.32 ; J1.2 6.35,19.2 ; J1.2 6.35,21.44 ; 6.35,16.66 J1.1 ; J1.1 7.47,17.78 ; J1.1 5.23,17.78 ; J1.1 6.35,18.9 ; J1.33 11.43,18.9 ; J1.33 10.31,17.78 ; J1.33 11.43,16.66 ; J1.33 12.55,17.78
  BOTTOM w0.381: v2(80.22,31.12) 80.12,31.22 C22.2 ; C21.2 v2(78.11,20.11) ; v2(107.53,31.54) 107.44,31.45 C1.2 ; C6.2 106.81,9.23 v2(106.89,9.31)
GND: length 338.8
  TOP w0.381: U19.1 v2(32.6,71.75) ; U13.27 v2(85.09,98) ; U19.28 v2(18.84,84.45) ; 11.43,24.77 14.6,21.59 23.71,21.59 v2(23.92,21.38) ; 11.43,24.77 J1.35 ; 11.43,24.77 J1.36 ; U20.21 v2(32.6,36.2) ; v2(68.58,108.16) 68.5,108.08 U16.74 ; U1.1 v2(84.67,10.16) 79.8,5.29 72.18,5.29 72.18,8.89 v2(70.91,10.16) U1.20 73.81,10.16 75.56,11.91 75.56,21.38 v2(74.3,22.65) ; v2(18.84,73.66) U19.45 ; 21.08,53.98 v2(18.84,53.98) ; U19.34 v2(18.84,80.64) ; J1.35 J1.34 ; J1.35 J1.3 ; U20.10 v2(32.6,29.21) ; v2(85.09,84.03) U8.27 ; v2(54.4,10.16) U15.10 ; U20.25 v2(18.84,38.1) ; v2(64.77,78.95) U16.53 ; v2(32.6,57.15) U21.15 ; v2(70.91,27.3) U2.20 76.2,27.3 76.2,24.55 v2(74.3,22.65) ; U20.4 v2(32.6,25.4) ; U14.1 v2(54.4,55.88) ; U2.1 v2(84.67,27.3) 80.01,22.65 v2(74.3,22.65) ; U20.15 v2(32.6,32.38) ; U21.45 v2(18.84,50.16) ; U16.17 35.64,101.73 v2(35.56,101.81) 32.6,101.81 31.75,100.97 31.75,91.51 27.87,87.63 26.04,87.63 25.4,88.27 25.4,90.8 24.34,90.8 v2(23.92,91.23) ; U10.27 v2(109.22,84.03) ; U20.24 v2(32.6,38.1) ; U19.39 v2(18.84,77.47) ; v2(18.84,25.4) U20.45 ; v2(32.6,60.96) U21.21 ; U21.1 v2(32.6,48.26) ; v2(32.6,50.16) U21.4 ; v2(32.6,77.47) U19.10 ; v2(109.22,98) U3.27 ; v2(32.6,80.64) U19.15 ; U21.48 v2(18.84,48.26) ; U20.39 v2(18.84,29.21) ; U12.27 v2(85.09,70.06) ; U21.34 v2(18.84,57.15) ; v2(109.22,111.97) U4.27 ; U20.34 v2(18.84,32.38) ; U17.10 v2(54.4,27.3) ; U20.28 v2(18.84,36.2) ; v2(32.6,53.98) 30.48,53.98 ; 40,26.03 40,24.9 40.43,24.48 v2(40.43,23.28) 38.73,21.59 v2(38.73,19.05) v2(38.73,16.51) v2(38.73,13.97) v2(38.73,11.43) v2(38.73,8.89) v2(38.73,6.35) ; v2(85.09,111.97) U9.27 ; U16.75 v2(64.77,111.97) ; v2(18.84,71.75) U19.48 ; U14.10 v2(54.4,44.45) ; v2(50.38,73.02) U25.10 ; v2(109.22,70.06) U11.27 ; v2(32.6,73.66) U19.4 ; U21.28 v2(18.84,60.96) ; v2(54.4,21.59) U15.1 ; v2(32.6,84.45) U19.21 ; v2(54.4,38.73) U17.1
  BOTTOM w0.381: C8.2 v2(38.73,8.89) ; C11.2 24,46.06 v2(23.92,46.14) ; v2(23.92,21.38) 24,21.29 C15.2 ; v2(85.09,70.06) 85.22,69.93 85.22,66.98 85.3,66.89 v2(85.3,66.04) ; v2(85.94,107.95) 85.94,108.8 85.85,108.89 C25.2 85.85,111.21 v2(85.09,111.97) ; C10.2 24,68.92 v2(23.92,69) ; v2(85.09,84.03) 85.22,83.9 85.22,80.95 85.3,80.86 v2(85.3,80.01) ; v2(85.3,93.98) 85.3,94.83 85.22,94.92 85.22,97.87 v2(85.09,98) ; v2(109.43,66.04) 109.43,66.89 109.35,66.98 C14.2 109.35,69.93 v2(109.22,70.06) ; v2(70.91,10.16) 70.91,7.62 C3.2 ; v2(54.4,21.59) v2(54.4,27.3) 55.04,26.66 59.05,26.66 59.05,26.67 59.05,40 55.67,40 v2(54.4,38.73) v2(54.4,44.45) ; C9.2 24,91.14 v2(23.92,91.23) ; C2.2 74.4,22.75 v2(74.3,22.65) ; C20.2 v2(38.73,16.51) ; v2(40.43,23.28) 40.41,23.27 C7.2 ; C24.2 v2(38.73,19.05) ; v2(38.73,11.43) C16.2 ; v2(109.43,107.95) 109.43,108.8 109.35,108.89 C4.2 109.35,111.84 v2(109.22,111.97) ; v2(109.43,80.01) 109.43,80.46 109.35,80.54 C12.2 109.35,83.9 v2(109.22,84.03) ; v2(109.43,93.98) 109.43,94.83 109.35,94.92 C13.2 109.35,97.87 v2(109.22,98) ; v2(38.73,13.97) C17.2 ; C19.2 38.73,3.81 v2(38.73,6.35) C5.2
GND_EARTH: length 53.6
  GND w0.381: J3.2 114.18,38.1 ; J3.2 111.88,38.1 ; J3.2 113.03,36.95 ; J3.2 113.03,39.25 ; 113.03,16.63 J2.2 ; J2.2 113.03,18.93 ; J2.2 114.18,17.78 ; J2.2 111.88,17.78
  BOTTOM w0.381: v2(117.9,26.67) 120.9,26.67 121.28,27.05 121.28,32.38 115.57,38.1 J3.2 ; v2(117.9,26.67) v2(117.9,24.13) ; v2(117.9,26.67) C18.2 ; C23.2 v2(117.9,24.13) ; v2(117.9,24.13) 120.65,24.13 121.28,23.49 121.28,19.05 120.02,17.78 J2.2
V12N: length 338.4
  TOP w0.381: v1(99.7,12.07) 99.7,9.24 99.63,9.18 99.63,7.68 100.33,6.99 100.97,6.99 101.35,7.37 101.35,12.32 101.73,12.7 U6.7 ; U5.7 100.58,34.29 95.59,39.28 92.91,39.28 92.18,38.55 U22.4 90.99,37.36 88.27,34.64 88.27,21.59 88.9,20.95 95.25,20.95 99.06,17.14 99.06,15.24 95.25,11.43 93.15,11.43 88.9,15.68 88.9,17.4 89.28,17.78 90.89,17.78 90.99,17.68 U23.4 ; J1.32 J1.31
  BOTTOM w0.381: v1(99.7,12.07) 97.7,14.06 97.7,14.81 98.11,15.21 98.11,17.03 95.54,19.6 92.91,19.6 92.18,18.86 U23.4 ; U22.4 90.99,37.36 88.27,34.64 88.27,31.5 87.88,31.12 86.11,31.12 85.73,31.5 85.73,32.92 85.34,33.3 81.66,33.3 81.28,33.68 81.28,42.16 80.9,42.55 70.23,42.55 69.22,41.53 69.22,24.83 67.88,23.49 63.88,23.49 63.5,23.11 63.5,1.65 63.12,1.27 23.24,1.27 22.86,1.65 22.86,5.97 22.48,6.35 1.9,6.35 1.27,6.99 1.27,60.89 2.4,62.02 2.4,62.44 1.27,63.57 1.27,92.71 2.54,93.98 J1.31
VCC: length 608.4
  TOP w0.381: v2(84.67,28.58) U2.2 80.39,28.58 79.32,29.65 79.32,36.39 80.39,37.46 v2(84.67,37.46) 87.88,37.46 88.27,37.85 88.27,39.37 86.36,41.27 70.7,41.27 v2(68.16,38.73) ; U17.20 v2(68.16,38.73) ; v2(68.16,38.73) 62.86,44.03 62.86,55.5 63.25,55.88 U14.20 v2(67.1,55.88) ; U21.31 v2(18.84,59.05) ; v2(84.67,20.32) U1.9 81.06,20.32 79.95,19.2 79.95,11.49 80.01,11.43 81.76,11.43 ; v2(68.58,105.62) 68.5,105.54 64.52,105.54 64.39,105.41 v1(62.23,105.41) ; v2(84.67,11.43) U1.2 81.76,11.43 ; v2(18.84,75.56) U19.42 23.78,75.56 23.84,75.63 24.42,75.63 24.48,75.56 U19.7 v2(32.6,75.56) ; v1(25.46,27.37) 23.53,27.37 23.47,27.3 U20.42 v2(18.84,27.3) ; v1(27.3,27.3) 26.81,26.81 26.81,26.36 27.3,25.86 v2(27.3,21.38) ; v1(29.21,44.45) 31.75,41.91 33.02,41.91 33.66,41.27 33.66,35.35 v2(32.6,34.29) U20.18 ; U21.7 v2(32.6,52.07) ; U20.31 v2(18.84,34.29) ; U19.18 v2(32.6,82.55) ; 81.76,11.43 81.26,10.93 81.26,10.83 81.06,10.63 81.06,9.94 80.86,9.74 v2(79.38,9.74) ; v1(15.24,79.38) 15.74,79.87 16.16,79.87 v2(18.84,82.55) U19.31 ; U20.7 v2(32.6,27.3) ; v2(18.84,52.07) U21.42 ; v2(63.5,78.95) U16.52 ; U16.16 35.64,103 v2(35.56,103.08) 32.59,103.08 31.11,101.6 31.11,94.13 28.21,91.23 v2(27.3,91.23) 26.4,91.23 26.19,91.44 24.99,91.44 24.3,92.13 23.54,92.13 22.85,91.44 J1.62 J1.30 J1.29 ; v1(47.62,59.05) 47.62,53.98 45.3,53.98 v2(37.68,61.59) U25.20 ; U15.20 v2(68.16,21.59) ; U21.18 v2(32.6,59.05) ; v2(58.42,111.97) U16.80
  BOTTOM w0.381: 84.67,28.58 85.73,27.52 85.73,21.37 84.67,20.32 v2(84.67,20.32) ; 84.67,28.58 88.9,28.58 L2.1 ; 84.67,28.58 v2(84.67,28.58) 84.66,28.58 83.76,27.68 83.76,27.44 81.09,24.77 C2.1 ; v2(32.6,82.55) 31.33,81.28 29.21,81.28 28.84,80.91 28.84,80.04 29.04,79.83 29.04,78.92 28.57,78.45 28.57,76.2 29.21,75.56 ; v2(32.6,52.07) 29.21,52.07 26.66,49.52 26.66,46.78 v2(27.3,46.14) ; C2.1 v2(79.38,26.88) ; C2.1 77.66,24.77 76.15,26.28 72.84,26.28 v2(68.16,21.59) ; D4.1 114.94,48.26 D3.1 106.05,50.8 102.87,50.8 ; D2.1 98.42,53.34 D1.1 102.87,50.8 ; C4.1 v2(106.05,111.55) ; C4.1 v2(106.05,97.58) C13.1 106.05,89.53 104.78,88.27 104.78,84.88 v2(106.05,83.61) C12.1 ; C4.1 105,110.9 105,111.53 103.44,113.09 95.61,113.09 95.4,112.89 94.47,112.89 94.27,113.09 83.88,113.09 v2(82.55,111.76) ; v2(27.3,91.23) C9.1 ; 29.21,75.56 27.69,75.56 27.24,75.12 27.24,69.07 v2(27.3,69) C10.1 ; 29.21,75.56 v2(32.6,75.56) ; C3.1 v2(79.38,9.74) 80.28,9.74 81.92,8.1 81.92,3.17 82.55,2.54 L6.1 ; v2(27.3,46.14) 28.4,46.14 29.21,45.34 v1(29.21,44.45) ; v2(27.3,46.14) C11.1 ; v2(32.6,59.05) 35.14,59.05 v2(37.68,61.59) ; v2(32.6,34.29) 28.57,34.29 27.94,33.66 27.94,28.58 29.21,27.3 ; v1(62.23,105.41) 61.59,105.41 58.42,108.58 v2(58.42,111.97) ; v2(106.05,69.64) C14.1 106.05,53.98 102.87,50.8 ; v2(82.55,111.76) 77.13,111.76 76.66,112.23 74.47,112.23 73.19,110.95 73.19,107.48 71.33,105.62 v2(68.58,105.62) ; v2(82.55,111.76) C25.1 ; v2(63.5,78.95) 63.5,59.48 v2(67.1,55.88) 63.5,55.88 60.33,59.05 v1(47.62,59.05) ; J1.62 10.16,90.17 10.16,82.93 10.54,82.55 v2(18.84,82.55) ; 29.21,27.3 v1(27.3,27.3) ; 29.21,27.3 v2(32.6,27.3) ; v2(81.92,83.61) C27.1 78.11,81.91 76.2,80.01 76.2,70.48 78.74,67.95 78.74,66.04 80.07,64.71 82.74,64.71 83.12,65.09 83.12,67.56 82.74,67.95 C28.1 v2(81.92,69.64) ; 82.55,98.42 81.92,97.79 v2(81.92,97.58) C26.1 ; v1(25.46,27.37) 25.46,30.06 25.34,30.19 25.34,30.77 25.46,30.9 25.46,33.59 24.77,34.29 v2(18.84,34.29) ; v2(27.3,21.38) C15.1 ; v1(15.24,79.38) 17.08,77.53 17.08,76.55 17.49,76.14 17.49,76.01 17.93,75.56 v2(18.84,75.56)
A0: length 17.9
  TOP w0.203: v1(24.13,72.39) U19.47
  BOTTOM w0.203: J1.54 13.33,69.22 20.95,69.22 v1(24.13,72.39)
A1: length 20.4
  TOP w0.203: v1(24.13,73.66) 23.49,73.02 U19.46
  BOTTOM w0.203: J1.55 13.33,71.75 13.33,70.05 13.54,69.85 20.75,69.85 20.95,70.05 20.95,70.48 v1(24.13,73.66)
A2: length 10.6
  TOP w0.203: v1(17.14,74.3) 17.32,74.47 19.18,74.47 19.35,74.3 U19.44
  BOTTOM w0.203: J1.56 13.33,74.3 v1(17.14,74.3)
A3: length 18.2
  TOP w0.203: v1(24.13,74.93) U19.43
  BOTTOM w0.203: v1(24.13,74.93) 23.67,74.47 17.91,74.47 16.59,75.8 16.59,76.67 14.51,78.74 J1.57
A4: length 29.1
  TOP w0.203: v1(23.49,81.91) 24.1,82.52 26.7,82.52 28.57,80.64 28.57,78.57 26.21,76.2 U19.41
  BOTTOM w0.203: v1(23.49,81.91) 22.86,81.28 19.35,81.28 19.18,81.46 18.5,81.46 18.32,81.28 J1.58
A5: length 25.5
  TOP w0.203: v1(24.77,76.83) U19.40 ; v1(25.4,81.91) 26.67,80.64 v1(26.67,78.11)
  BOTTOM w0.203: J1.59 18.32,83.82 18.5,83.64 19.18,83.64 19.33,83.79 23.75,83.79 25.4,82.14 v1(25.4,81.91) ; v1(24.77,76.83) 26.04,78.11 v1(26.67,78.11)
A6: length 32.7
  TOP w0.203: U19.38 25.81,78.11 26.42,77.5 26.92,77.5 27.94,78.51 v1(27.94,79.38)
  BOTTOM w0.203: v1(27.94,79.38) 27.94,81.11 27.56,81.49 27.56,83.61 27.94,83.99 27.94,86.36 27.3,87 13.33,87 12.7,86.36 J1.60
A7: length 34
  TOP w0.203: v1(23.49,78.74) U19.37
  BOTTOM w0.203: J1.61 12.7,88.9 13.97,87.63 27.3,87.63 28.57,86.36 28.57,84.05 27.97,83.44 27.97,81.66 28.35,81.28 28.35,79.83 28.55,79.63 28.55,79.12 28.19,78.77 26.24,78.77 25.65,79.35 25.15,79.35 24.54,78.74 v1(23.49,78.74)
A8: length 21.4
  TOP w0.203: v1(23.49,48.89) U21.47
  BOTTOM w0.203: J1.13 8.25,50.16 10.52,50.16 10.98,49.71 11.88,49.71 12.34,50.16 17.69,50.16 18.5,49.35 19.18,49.35 19.35,49.53 20.32,49.53 20.95,48.89 v1(23.49,48.89)
A9: length 16.3
  TOP w0.203: J1.14 7.44,49.71 11.88,49.71 12.98,50.8 16.51,50.8 17.96,49.35 19.18,49.35 19.35,49.53 U21.46
A10: length 21.7
  TOP w0.203: v1(23.49,50.8) U21.44
  BOTTOM w0.203: J1.15 7.44,52.25 11.88,52.25 12.98,53.34 14.6,53.34 17.14,50.8 18.32,50.8 18.5,50.98 20.78,50.98 20.95,50.8 v1(23.49,50.8)
A11: length 17.2
  TOP w0.203: J1.16 7.44,54.79 11.88,54.79 12.52,55.43 13.15,55.43 17.32,51.26 19.18,51.26 19.35,51.43 U21.43
A12: length 23.3
  TOP w0.203: v1(24.13,52.7) U21.41
  BOTTOM w0.203: v1(24.13,52.7) 23.95,52.88 18.5,52.88 18.32,52.7 17.14,52.7 12.52,57.33 7.44,57.33 J1.17
A13: length 18
  TOP w0.203: J1.18 7.44,59.87 11.8,59.87 18.5,53.16 19.18,53.16 19.31,53.29 19.54,53.29 19.58,53.34 U21.40
A14: length 18.6
  TOP w0.203: J1.19 10.16,63.5 10.34,63.32 10.34,63.05 11.33,62.05 11.91,62.05 19.35,54.61 U21.38
A15: length 20.2
  TOP w0.203: J1.20 7.8,64.59 11.88,64.59 18.03,58.45 18.03,56.81 18.5,56.34 18.5,56.33 19.58,55.24 U21.37
A16: length 11
  TOP w0.203: v1(19.05,31.12) U20.36
  BOTTOM w0.203: v1(19.05,31.12) 15.88,27.94 J1.37
A17: length 27.9
  TOP w0.203: v1(24.13,31.75) U20.35
  BOTTOM w0.203: v1(24.13,31.75) 23.49,31.12 23.49,26.87 23.11,26.49 9.91,26.49 9.52,26.87 9.52,30.28 9.73,30.48 J1.38
A18: length 41
  TOP w0.203: U20.33 v1(24.77,33.02) v1(24.77,41.27)
  BOTTOM w0.203: 40,41.27 30.02,41.27 29.61,40.87 25.86,40.87 25.46,41.27 v1(24.77,41.27) ; J1.39 18.32,33.02 18.5,33.2 24.59,33.2 v1(24.77,33.02)
A19: length 64
  TOP w0.203: v1(22.23,41.91) 20.95,41.91 15.24,47.62 12.34,47.62 11.71,46.99 10.36,46.99 10.16,46.79 10.16,40 10.97,39.19 16.05,39.19 16.51,38.73 16.51,34.29 v1(17.14,33.66) 18.32,33.66 18.5,33.48 19.18,33.48 19.35,33.66 U20.32
  BOTTOM w0.203: 40,43.81 31.11,43.81 29.84,42.55 29.84,41.68 29.44,41.27 26.04,41.27 25.4,41.91 v1(22.23,41.91) ; v1(17.14,33.66) 15.24,35.56 J1.40
A20: length 50.4
  TOP w0.203: v1(23.49,41.27) 21.59,41.27 v1(20.32,40) 21.46,40 24.1,37.36 24.1,35.31 23.75,34.95 23.24,34.95 23.04,35.15 22.81,35.15 22.58,34.92 U20.30 ; 40,46.35 41.05,46.35 41.27,46.13 41.27,40.64 v1(41.91,40)
  BOTTOM w0.203: v1(20.32,40) 13.33,40 J1.41 ; v1(23.49,41.27) 24.77,40 v1(41.91,40)
A21: length 53
  TOP w0.203: v1(23.49,35.56) U20.29 19.35,35.56 19.18,35.38 17.32,35.38 17.14,35.56 17.14,40.44 16.94,40.64 J1.42 ; v1(25.4,38.73) v1(25.4,35.56)
  BOTTOM w0.203: v1(25.4,35.56) v1(23.49,35.56) ; 40,48.89 41.71,48.89 42.52,48.08 42.52,38.28 41.53,37.29 26.85,37.29 v1(25.4,38.73)
A22: length 15.5
  TOP w0.203: J1.43 17.58,43.18 17.78,42.98 17.78,37.46 18.24,37.01 19.18,37.01 19.35,36.83 U20.27
A23: length 56
  TOP w0.203: U20.26 21.21,37.59 22.28,37.59 22.58,37.89 22.58,38.31 22.28,38.61 19.94,38.61 18.41,40.13 18.41,43.61 18.21,43.81 13.33,43.81 J1.44
  BOTTOM w0.203: J1.44 22.9,45.72 23.11,45.92 23.11,46.76 23.31,46.96 25.37,46.96 26.04,47.62 26.04,51.43 27.94,53.34 27.94,55.68 28.14,55.88 33.66,55.88 35.56,53.98 40,53.98
AEN/: length 105.8
  BOTTOM w0.203: 40,36.2 41.71,36.2 41.91,35.99 41.91,24.77 41.24,24.1 40.09,24.1 39.62,23.62 39.62,22.5 39.47,22.35 39.47,22.33 38.1,20.95 30.05,20.95 29.84,20.75 29.84,17.35 29.64,17.14 22.23,17.14 19.19,20.18 18.91,20.18 14.6,15.88 4.44,15.88 3.81,16.51 3.81,53.34 4.9,54.43 10.34,54.43 J1.47
BA0: length 75.8
  TOP w0.203: v1(28.57,33.02) 28.17,33.43 28.17,46.53 28.98,47.34 28.98,48.59 29.29,48.89 U21.2 ; U19.2 28.98,72.39 28.72,72.13 28.72,71.61 30.48,69.85 33.02,69.85 42.34,79.17 44.3,79.17 45.06,79.93 45.06,81.89 45.72,82.55 45.72,83.24 45.11,83.85 45.11,107.92 45.72,108.53 U16.6 ; v1(28.57,31.12) U20.13
  BOTTOM w0.203: v1(28.57,33.02) v1(28.57,31.12)
BA1: length 76
  TOP w0.203: v1(27.94,73.02) U19.3 ; U16.7 44.45,82.93 43.79,82.27 43.79,79.93 43.43,79.58 41.48,79.58 v1(34.29,72.39) ; U20.14 28.57,31.75 27.76,32.56 27.76,45.04 27.48,45.33 26.97,45.33 26.49,45.81 26.49,46.48 26.97,46.96 27.91,46.96 28.57,47.62 28.57,49.12 28.98,49.53 U21.3
  BOTTOM w0.203: v1(27.94,73.02) 28.57,72.39 32.08,72.39 32.26,72.57 32.93,72.57 33.11,72.39 v1(34.29,72.39)
BA2: length 73
  TOP w0.203: v1(27.94,74.3) U19.5 ; U20.16 32.08,33.02 32.54,33.48 32.93,33.48 34.7,35.24 34.7,49.76 33.48,50.98 32.26,50.98 32.08,50.8 U21.5 ; v1(33.66,74.3) 34.34,74.3 39.98,79.93 39.98,81.83 43.18,85.03 U16.8
  BOTTOM w0.203: v1(33.66,74.3) 33.22,74.73 28.37,74.73 v1(27.94,74.3)
BA3: length 83.1
  TOP w0.203: v1(27.3,51.43) U21.6 ; U16.9 41.91,85.42 38.56,82.07 37.67,82.07 33.41,77.81 33.41,77.13 32.93,76.66 32.93,76.38 33.41,75.9 33.41,75.23 32.93,74.75 32.26,74.75 32.08,74.93 U19.6 ; v1(34.29,47.62) 34.11,47.45 32.26,47.45 32.08,47.62 29.84,47.62 28.57,46.35 28.57,33.86 28.78,33.66 U20.17
  BOTTOM w0.203: v1(34.29,47.62) 34.29,50.8 33.66,51.43 33.66,55.04 33.45,55.24 29.16,55.24 28.35,54.43 28.35,52.48 v1(27.3,51.43)
BD0: length 17.7
  TOP w0.203: U19.13 33.66,79.38 34.63,80.35 34.63,85.3 34.29,85.64 34.29,88.98 36.88,91.57 U16.25
BD1: length 18.4
  TOP w0.203: U16.24 36.88,92.84 34.29,90.25 34.29,89.55 33.88,89.15 33.88,85.47 34.22,85.13 34.22,80.78 33.27,79.83 32.26,79.83 32.08,80.01 U19.14
BD2: length 17.6
  TOP w0.203: U16.23 36.88,94.11 33.88,91.11 33.88,89.72 33.48,89.32 33.48,85.3 33.82,84.96 33.82,82.62 32.65,81.46 32.16,81.46 31.98,81.28 U19.16
BD3: length 20.6
  TOP w0.203: v1(28.57,81.91) U19.17 ; 37.59,95.38 v1(35.05,95.38)
  BOTTOM w0.203: v1(28.57,81.91) 29.84,83.19 29.84,87.63 35.05,92.84 v1(35.05,95.38)
BD4: length 21
  TOP w0.203: v1(28.57,83.19) U19.19 ; U16.21 v1(34.42,96.65)
  BOTTOM w0.203: v1(34.42,96.65) 34.42,92.84 29.21,87.63 29.21,83.82 v1(28.57,83.19)
BD5: length 21.3
  TOP w0.203: U16.20 33.86,97.92 33.48,97.54 33.48,89.89 33.07,89.49 33.07,85.13 33.41,84.79 33.41,83.98 33.07,83.64 32.26,83.64 32.08,83.82 U19.20
BD6: length 20.2
  TOP w0.203: U19.22 31.98,85.09 32.66,85.78 32.66,89.66 33.02,90.01 33.02,98.42 33.78,99.19 U16.19
BD7: length 22.4
  TOP w0.203: U19.23 29.41,85.72 28.72,86.41 28.72,87.77 32.38,91.44 32.38,99.69 33.15,100.46 37.59,100.46
BD8: length 44.9
  TOP w0.203: U20.2 28.98,24.13 27.94,25.17 27.94,25.92 27.76,26.1 27.76,26.9 27.91,27.05 27.91,27.56 26.26,29.21 26.26,29.5 26.26,29.51 26.26,29.84 26.64,30.23 26.64,30.73 26.09,31.29 26.09,43.91 24.87,45.13 24.87,55.2 26.26,56.59 26.26,59.45 26.49,59.68 26.49,59.74 28.98,62.23 U21.23
BD9: length 43.1
  TOP w0.203: U20.3 29.41,24.77 28.98,25.19 28.98,25.46 28.17,26.27 28.17,26.73 28.32,26.88 28.32,27.39 28.32,27.39 28.32,27.73 26.67,29.38 26.67,29.67 27.05,30.06 27.05,30.9 26.49,31.46 26.49,44.08 25.27,45.3 25.27,55.03 26.67,56.42 26.67,59.28 28.98,61.59 U21.22
BD10: length 40.2
  TOP w0.203: U20.5 28.98,26.03 28.73,26.29 28.73,27.22 28.73,27.22 28.73,27.9 27.3,29.32 27.3,29.73 27.46,29.89 27.46,31.07 26.9,31.63 26.9,44.25 25.68,45.47 25.68,54.86 27.3,56.48 27.3,58.65 28.98,60.32 U21.20
BD11: length 47.1
  TOP w0.203: U21.19 31.98,59.69 32.44,60.15 32.93,60.15 33.11,60.32 37.47,60.32 38.1,59.69 38.1,29.84 34.75,26.49 32.26,26.49 32.08,26.67 U20.6
BD12: length 43.5
  TOP w0.203: U21.17 32.08,58.42 32.26,58.24 32.93,58.24 33.11,58.42 37.26,58.42 37.47,58.22 37.47,29.84 35.56,27.94 33.11,27.94 32.93,28.12 32.26,28.12 32.08,27.94 U20.8
BD13: length 37.2
  TOP w0.203: 30.48,28.58 28.98,28.58 27.86,29.69 27.86,31.24 27.3,31.8 27.3,44.69 27.07,44.92 26.8,44.92 26.09,45.64 26.09,46.65 26.8,47.36 27.71,47.36 28.12,47.77 28.12,50.39 27.69,50.83 27.05,50.83 26.67,51.21 26.67,51.66 27.05,52.04 27.69,52.04 28.12,52.48 28.12,56.92 28.98,57.78 U21.16
BD14: length 39.2
  TOP w0.203: U20.11 32.08,29.84 32.26,30.02 32.93,30.02 33.11,29.84 36.2,29.84 36.83,30.48 36.83,56.31 36.63,56.52 33.11,56.52 32.93,56.34 32.26,56.34 32.08,56.52 U21.14
BD15: length 36.3
  TOP w0.203: U20.12 35.56,30.48 36.2,31.12 36.2,55.68 35.99,55.88 U21.13
BRD/: length 111.1
  TOP w0.203: v1(47.62,107.72) 48.67,106.68 64.39,106.68 64.52,106.81 U16.73
  BOTTOM w0.203: v1(47.62,107.72) 46.58,106.68 44.45,106.68 43.18,105.41 43.18,83.82 41.27,81.91 41.27,74.93 40.64,74.3 40.64,57.15 41.27,56.52 50.6,56.52 50.8,56.31 50.8,34.29 47.62,31.12
BWR/: length 132
  TOP w0.203: v1(46.36,107.31) 47.02,106.65 47.02,106.43 47.37,106.07 47.6,106.07 47.62,106.05 56.52,106.05 65.23,97.33 65.23,86.23 65.63,85.83 67.51,85.83 67.87,85.47 67.87,84.96 67.51,84.61 65.63,84.61 65.23,84.2 65.23,83.29 65.84,82.68 66.55,82.68
  BOTTOM w0.203: v1(46.36,107.31) 44.45,107.31 42.55,105.41 42.55,83.82 40.64,81.91 40.64,75.56 40,74.93 40,56.52 40.64,55.88 49.96,55.88 50.17,55.68 50.17,34.92 48.89,33.66 47.62,33.66
D0: length 109.7
  TOP w0.203: J1.28 7.62,87.63 9.52,87.63 10.34,86.81 10.34,85.91 10.98,85.27 11.88,85.27 12.52,85.91 12.52,87.12 13.92,85.72 U19.26 22.58,85.72 22.86,86 22.86,87.43 22.66,87.63 15.88,87.63 12.7,90.8 12.34,90.8 11.88,90.35 10.98,90.35 10.52,90.8 v1(7.62,90.8) ; v1(1.9,62.23) 8.25,62.23 v1(8.89,62.86) ; v1(19.05,62.23) U21.26
  BOTTOM w0.203: v1(19.05,62.23) 18.41,62.86 12.34,62.86 11.88,62.41 10.98,62.41 10.52,62.86 v1(8.89,62.86) ; v1(7.62,90.8) 7.62,97.59 7.42,97.79 0.84,97.79 0.63,97.59 0.63,62.43 0.84,62.23 v1(1.9,62.23)
D1: length 20.2
  TOP w0.203: 15.42,85.27 19.18,85.27 19.35,85.09 U19.27 ; 15.42,85.27 14.42,85.27 11.88,82.73 9.98,82.73 8.89,83.82 J1.27 ; 15.42,85.27 12.7,82.55
D2: length 16.7
  TOP w0.203: J1.26 7.44,80.19 14.78,80.19 17.96,83.36 19.13,83.36 19.58,83.82 U19.29
D3: length 26.6
  TOP w0.203: v1(23.49,83.19) U19.30
  BOTTOM w0.203: J1.25 7.44,79.83 11.88,79.83 12.37,79.35 14.51,79.35 15.04,79.87 16.44,79.87 17.17,79.15 17.17,79.12 17.53,78.77 18.03,78.77 18.39,79.12 18.39,79.15 18.59,79.35 24.1,79.35 25.02,80.27 25.02,81.66 v1(23.49,83.19)
D4: length 20.6
  TOP w0.203: J1.24 7.44,75.11 10.09,75.11 10.34,75.35 10.34,76.65 10.98,77.29 11.88,77.29 12.52,76.65 12.52,75.75 15.66,78.88 15.87,78.88 18.45,81.46 19.13,81.46 19.58,81.91 U19.32
D5: length 24.9
  TOP w0.203: v1(17.78,79.38) 17.14,79.38 12.52,74.75 10.98,74.75 9.88,73.66 J1.23 ; v1(24.24,81.28) U19.33
  BOTTOM w0.203: v1(24.24,81.28) 24.24,80.12 23.93,79.81 18.21,79.81 v1(17.78,79.38)
D6: length 35.7
  TOP w0.203: U19.35 19.58,80.01 17.86,78.28 17.32,78.28 12.7,73.66 12.7,73.02 11.89,72.21 7.44,72.21 J1.22 ; U20.47 12.9,24.13 12.52,24.51 12.52,25.85 11.88,26.49 7.44,26.49 J1.4
D7: length 31.7
  TOP w0.203: J1.21 7.44,69.67 11.89,69.67 12.7,70.48 12.7,71.75 v1(17.78,76.83) ; U19.36 23.47,79.38 24.1,80.01 24.13,80.01 v1(25.4,78.74)
  BOTTOM w0.203: v1(25.4,78.74) 23.06,76.4 19.94,76.4 19.65,76.69 19.65,77.81 19.18,78.28 18.5,78.28 17.78,77.56 v1(17.78,76.83)
D9: length 19.2
  TOP w0.203: J1.5 9.52,27.94 10.79,29.21 12.5,29.21 13.33,28.37 13.33,24.97 13.72,24.59 19.18,24.59 19.35,24.77 U20.46
D10: length 19.7
  TOP w0.203: U20.44 19.58,26.03 19.13,26.49 14.35,26.49 13.97,26.87 13.97,30.48 12.7,31.75 7.62,31.75 J1.6
D11: length 47.4
  TOP w0.203: J1.7 4.65,33.02 4.44,32.82 4.44,21.79 4.65,21.59 8.69,21.59 8.89,21.39 8.89,19.25 9.09,19.05 19.69,19.05 21.73,21.09 23.05,21.09 23.58,20.57 24.26,20.57 24.73,21.04 24.73,21.72 24.26,22.19 22.83,22.19 24.13,23.49 24.13,26.03 23.49,26.67 U20.43
D12: length 17.9
  TOP w0.203: J1.8 7.62,34.29 12.06,34.29 17.96,28.4 19.13,28.4 19.58,27.94 U20.41
D13: length 62.8
  TOP w0.203: 21.08,28.58 25.12,28.58 26.07,27.62 26.07,24.8 24.43,23.16 24.43,22.6 25.14,21.89 25.14,20.87 24.43,20.16 23.41,20.16 22.88,20.69 21.96,20.69 15.88,14.61 4.44,14.61 3.81,15.24 3.81,37.46 4.44,38.1 J1.9
D14: length 20.1
  TOP w0.203: J1.10 8.89,40.64 10.34,39.19 10.34,37.65 10.98,37.01 12.29,37.01 19.46,29.84 U20.38
D15: length 33.7
  TOP w0.203: v1(26.04,30.48) U20.37
  BOTTOM w0.203: v1(26.04,30.48) 26.04,36.83 21.97,40.89 21.8,40.89 21.21,41.49 21.21,41.66 20.95,41.91 7.62,41.91 J1.11
DDIR: length 70.4
  TOP w0.203: v1(31.11,67.95) 30.48,67.31 U21.24 ; v1(31.75,87.63) 31.24,87.63 30.48,86.87 U19.24 ; 47.62,41.27 45.72,39.37 45.72,27.51 45.52,27.3 38.73,27.3 34.92,23.49 U20.1
  BOTTOM w0.203: v1(31.75,87.63) 38.73,87.63 39.37,87 39.37,80.01 36.83,77.47 36.83,71.75 33.02,67.95 v1(31.11,67.95)
DEN/: length 155.1
  TOP w0.203: 47.62,43.81 46.36,43.81 45.08,42.55 45.08,30.05 44.88,29.84 38.73,29.84 38.1,29.21 v1(38.1,27.94) ; U20.48 v1(21.08,22.35) ; v1(8.89,38.1) 7.8,39.19 5.9,39.19 5.44,38.73 2.74,38.73 1.3,40.18 1.3,86.18 2.74,87.63 6.63,87.63 7.44,88.45 7.44,89.36 8.25,90.17 9.52,90.17 10.34,89.36 10.34,88.45 10.98,87.81 11.88,87.81 12.52,88.45 12.52,89.71 15.88,86.36 U19.25
  BOTTOM w0.203: v1(38.1,27.94) 38.1,23.49 36.96,22.35 v1(21.08,22.35) 20.47,22.35 20.35,22.23 17.14,22.23 15.24,24.13 9.52,24.13 8.89,24.77 v1(8.89,38.1)
GAIN: length 197.8
  TOP w0.203: U6.6 103.85,13.97 106.05,16.17 106.05,16.51 106.25,16.71 107.11,16.71 107.31,16.92 107.31,28.37 107.52,28.58 107.95,28.58 114.94,35.56 114.94,39.37 113.03,41.27 102.23,41.27 100.97,40 100.97,36.69 ; v1(41.27,87.63) 39.75,87.63 39.62,87.76 U16.28 ; 100.97,36.69 102.1,35.56 U5.6 ; 100.97,36.69 95.89,41.77 95.89,49.33 95.68,49.53 87.83,49.53 87.63,49.73 87.63,54.41 87.43,54.61 69.22,54.61 68.58,55.24 68.58,57.58 67.34,58.83 62.06,58.83 61.7,58.47 60.91,58.47 57.78,61.59 57.78,95.89 v1(48.89,104.77)
  BOTTOM w0.203: v1(48.89,104.77) 48.89,108.38 48.69,108.58 41.48,108.58 41.27,108.38 v1(41.27,87.63)
MCLK: length 43.2
  TOP w0.203: U16.31 37.47,83.82 36.2,83.82 35.56,83.19 v1(35.56,82.55)
  BOTTOM w0.203: J1.52 13.33,64.14 19.68,64.14 20.95,65.41 29.01,65.41 29.21,65.61 29.21,69.01 29.41,69.22 31.98,69.22 35.56,72.8 v1(35.56,82.55)
MRD/: length 90.5
  BOTTOM w0.203: J1.46 7.9,50.8 6.8,51.89 5.54,51.89 4.44,50.8 4.44,21.79 4.65,21.59 19.05,21.59 22.86,17.78 29.01,17.78 29.21,17.98 29.21,21.39 29.41,21.59 37.47,21.59 39.21,23.33 39.21,23.79 39.92,24.5 40.81,24.5 41.27,24.97 41.27,33.45 41.07,33.66 40,33.66
MWR/: length 42.3
  BOTTOM w0.203: 40,31.12 38.96,31.12 38.33,30.48 33.86,30.48 33.66,30.68 33.66,34.92 33.48,35.1 32.26,35.1 32.08,34.92 28.57,34.92 22.2,41.3 21.97,41.3 21.62,41.66 21.62,41.88 18.87,44.63 10.98,44.63 10.34,45.27 10.34,47.17 J1.45
N00036_6360: length 55.8
  TOP w0.203: v1(100.97,13.97) 101.65,14.66 101.65,14.8 102.1,15.24 ; 102.1,15.24 100.58,15.24 99.95,14.61 99.7,14.61 99.06,13.97 99.06,12.07 98.42,11.43 95.95,11.43 95.45,10.93 91.94,10.93 87.63,15.24 U1.5 80.85,15.24 80.64,15.44 80.64,18.85 80.85,19.05 U1.8 ; 102.1,15.24 U6.5 ; v1(100.33,8.89) v1(100.33,12.7)
  BOTTOM w0.203: v1(100.33,8.89) 100.33,5.08 L6.2 ; v1(100.97,13.97) 100.33,13.34 v1(100.33,12.7) ; v1(100.97,13.97) 100.97,17.14 101.6,17.78 R3.1 ; v1(100.97,13.97) 101.6,13.34 R4.1
N00038_6372: length 17.2
  TOP w0.203: L3.2 85.73,10.79 85.73,13.34 85.09,13.97 U1.4 82.4,13.82 v1(80.64,13.82)
  BOTTOM w0.203: v1(80.64,13.82) 79.53,12.7 C21.1
N00044_6366: length 17.1
  TOP w0.203: U6.1 106.45,11.43 106.43,11.46 v1(101.57,11.46)
  BOTTOM w0.203: v1(101.57,11.46) 99.44,11.46 97.21,13.69 97.21,15.01 97.61,15.42 97.61,16.33 96.97,16.97 96.06,16.97 95.78,17.25 U23.2
N00048_6359: length 8
  TOP w0.203: v1(105.41,12.7) U6.2
  BOTTOM w0.203: R3.2 106.27,13.56 v1(105.41,12.7)
N00060_6368: length 13.8
  TOP w0.203: U1.6 85.73,16.51 89.53,20.32 92.08,20.32 U23.3
OUTA: length 9.6
  BOTTOM w0.203: L1.1 90.17,14.99 91.08,14.07 U23.6
OUTC: length 8.6
  TOP w0.203: U22.6 91.4,32.98 91.4,31.79 91.44,31.75 91.44,27.3 L4.1
RA0: length 62
  TOP w0.203: v1(74.93,87) 74.17,87.76 U16.58 ; U13.5 83.82,85.57 83.19,84.94 v1(83.19,83.82) ; U12.5 83.82,63.3 84.02,63.5 99.49,63.5 99.7,63.3 99.7,57.15 101.6,55.24 105.56,55.24 107.95,57.63 U11.5
  BOTTOM w0.203: v1(74.93,87) 77.9,87 78.11,86.79 78.11,83.39 78.31,83.19 80.34,83.19 81.58,84.42 82.58,84.42 v1(83.19,83.82)
RA1: length 102.3
  TOP w0.203: U13.4 82.55,84.96 82.14,84.56 80.16,84.56 79.76,84.96 79.35,85.37 79.35,87.58 79.17,87.76 78.31,87.76 78.13,87.58 75.62,87.58 72.9,90.3 66.55,90.3 ; U12.4 82.55,63.93 82.75,64.14 100.13,64.14 100.33,63.93 100.33,57.15 101.6,55.88 104.83,55.88 106.15,57.2 106.25,57.2 106.68,57.63 U11.4 ; U8.4 82.55,76 82.75,76.2 99.49,76.2 99.7,76 99.7,71.75 101.6,69.85 103.99,69.85 104.8,69.04 104.8,66.9 105.16,66.55 106.93,66.55 107.29,66.9 107.29,69.55 106.43,70.41 106.43,70.74 106.68,70.99 U10.4
RA2: length 91.3
  TOP w0.203: U16.61 76.07,91.57 79.88,87.76 80.26,87.76 81.28,86.74 U13.3 ; U10.3 105.41,71.7 104.2,70.48 101.6,70.48 100.33,71.75 100.33,76.63 100.13,76.83 81.48,76.83 81.28,76.63 U8.3 ; U11.3 105.41,57.63 104.98,57.2 104.88,57.2 104.2,56.52 101.6,56.52 100.97,57.15 100.97,64.57 100.76,64.77 82.09,64.77 81.28,63.96 U12.3
RA3: length 168.5
  TOP w0.203: 80.01,73.18 79.4,73.79 78.31,73.79 76.2,71.68 v1(76.2,58.42) ; 80.01,73.18 80.01,77.27 80.21,77.47 100.76,77.47 100.97,77.27 100.97,71.75 101.73,70.99 103.44,70.99 103.61,71.17 103.71,71.17 104.14,71.6 U10.2 104.14,80.26 104.75,80.87 104.75,84.07 104.14,84.68 U3.2 104.14,88.54 101.6,91.08 101.6,98.22 101.8,98.42 102.79,98.42 103.48,99.11 103.48,100.3 103.51,100.33 U4.2 ; 80.01,73.18 U8.2 ; U9.2 80.01,99.54 79.38,98.91 79.38,92.71 80.64,91.44 80.64,87.95 ; 80.64,87.95 80.01,88.59 80.01,90.6 79.81,90.8 77.55,90.8 75.51,92.84 U16.62 ; 80.64,87.95 80.84,87.76 81.53,87.76 81.89,87.4 81.89,85.32 81.53,84.96 80.62,84.96 80.01,85.57 U13.2 ; U11.2 104.14,57.63 103.71,57.2 103.61,57.2 103.44,57.02 101.93,57.02 101.6,57.35 101.6,65.2 101.4,65.41 85.82,65.41 85.64,65.23 84.96,65.23 84.79,65.41 82.14,65.41 81.53,64.8 80.82,64.8 80.01,63.98 U12.2 80.01,57.63 79.4,57.02 78.31,57.02 78.11,57.23 v1(78.11,58.42)
  BOTTOM w0.203: v1(76.2,58.42) v1(78.11,58.42)
RA4: length 100
  TOP w0.203: v1(78.74,69.85) U12.32 ; U4.32 v1(102.87,107.31) ; v1(102.87,92.71) U3.32 v1(102.87,97.79) ; U9.32 v1(78.74,107.31) ; v1(78.74,98.42) U13.32 v1(78.74,92.08) 77.72,93.09 77.44,93.09 77.09,92.74 76.43,92.74 75.06,94.11 U16.63 ; U11.32 101.6,67.95 v1(100.33,69.22) ; v1(102.87,79.38) U10.32 v1(102.87,84.45) ; v1(78.74,84.45) U8.32 v1(78.74,79.38)
  BOTTOM w0.203: v1(78.74,107.31) v1(78.74,98.42) ; v1(78.74,92.08) v1(78.74,84.45) ; v1(78.74,79.38) v1(78.74,69.85) ; v1(102.87,92.71) v1(102.87,84.45) ; v1(102.87,79.38) 100.33,76.83 v1(100.33,69.22) ; v1(102.87,107.31) v1(102.87,97.79)
